# Altium PCB FPGA.PcbDoc (part 1 of 4)
Units mil, origin at the board's own origin, x right, y up, seen from the top; angles counter-clockwise.
Board outline 4000 x 2400 mil, 6 copper layers (Top Layer, InternalPlane1, MidLayer1, InternalPlane2, InternalPlane3, Bottom Layer), stack 58.8 mil thick; 235 components, 235 nets, 1406 pads, 621 vias.
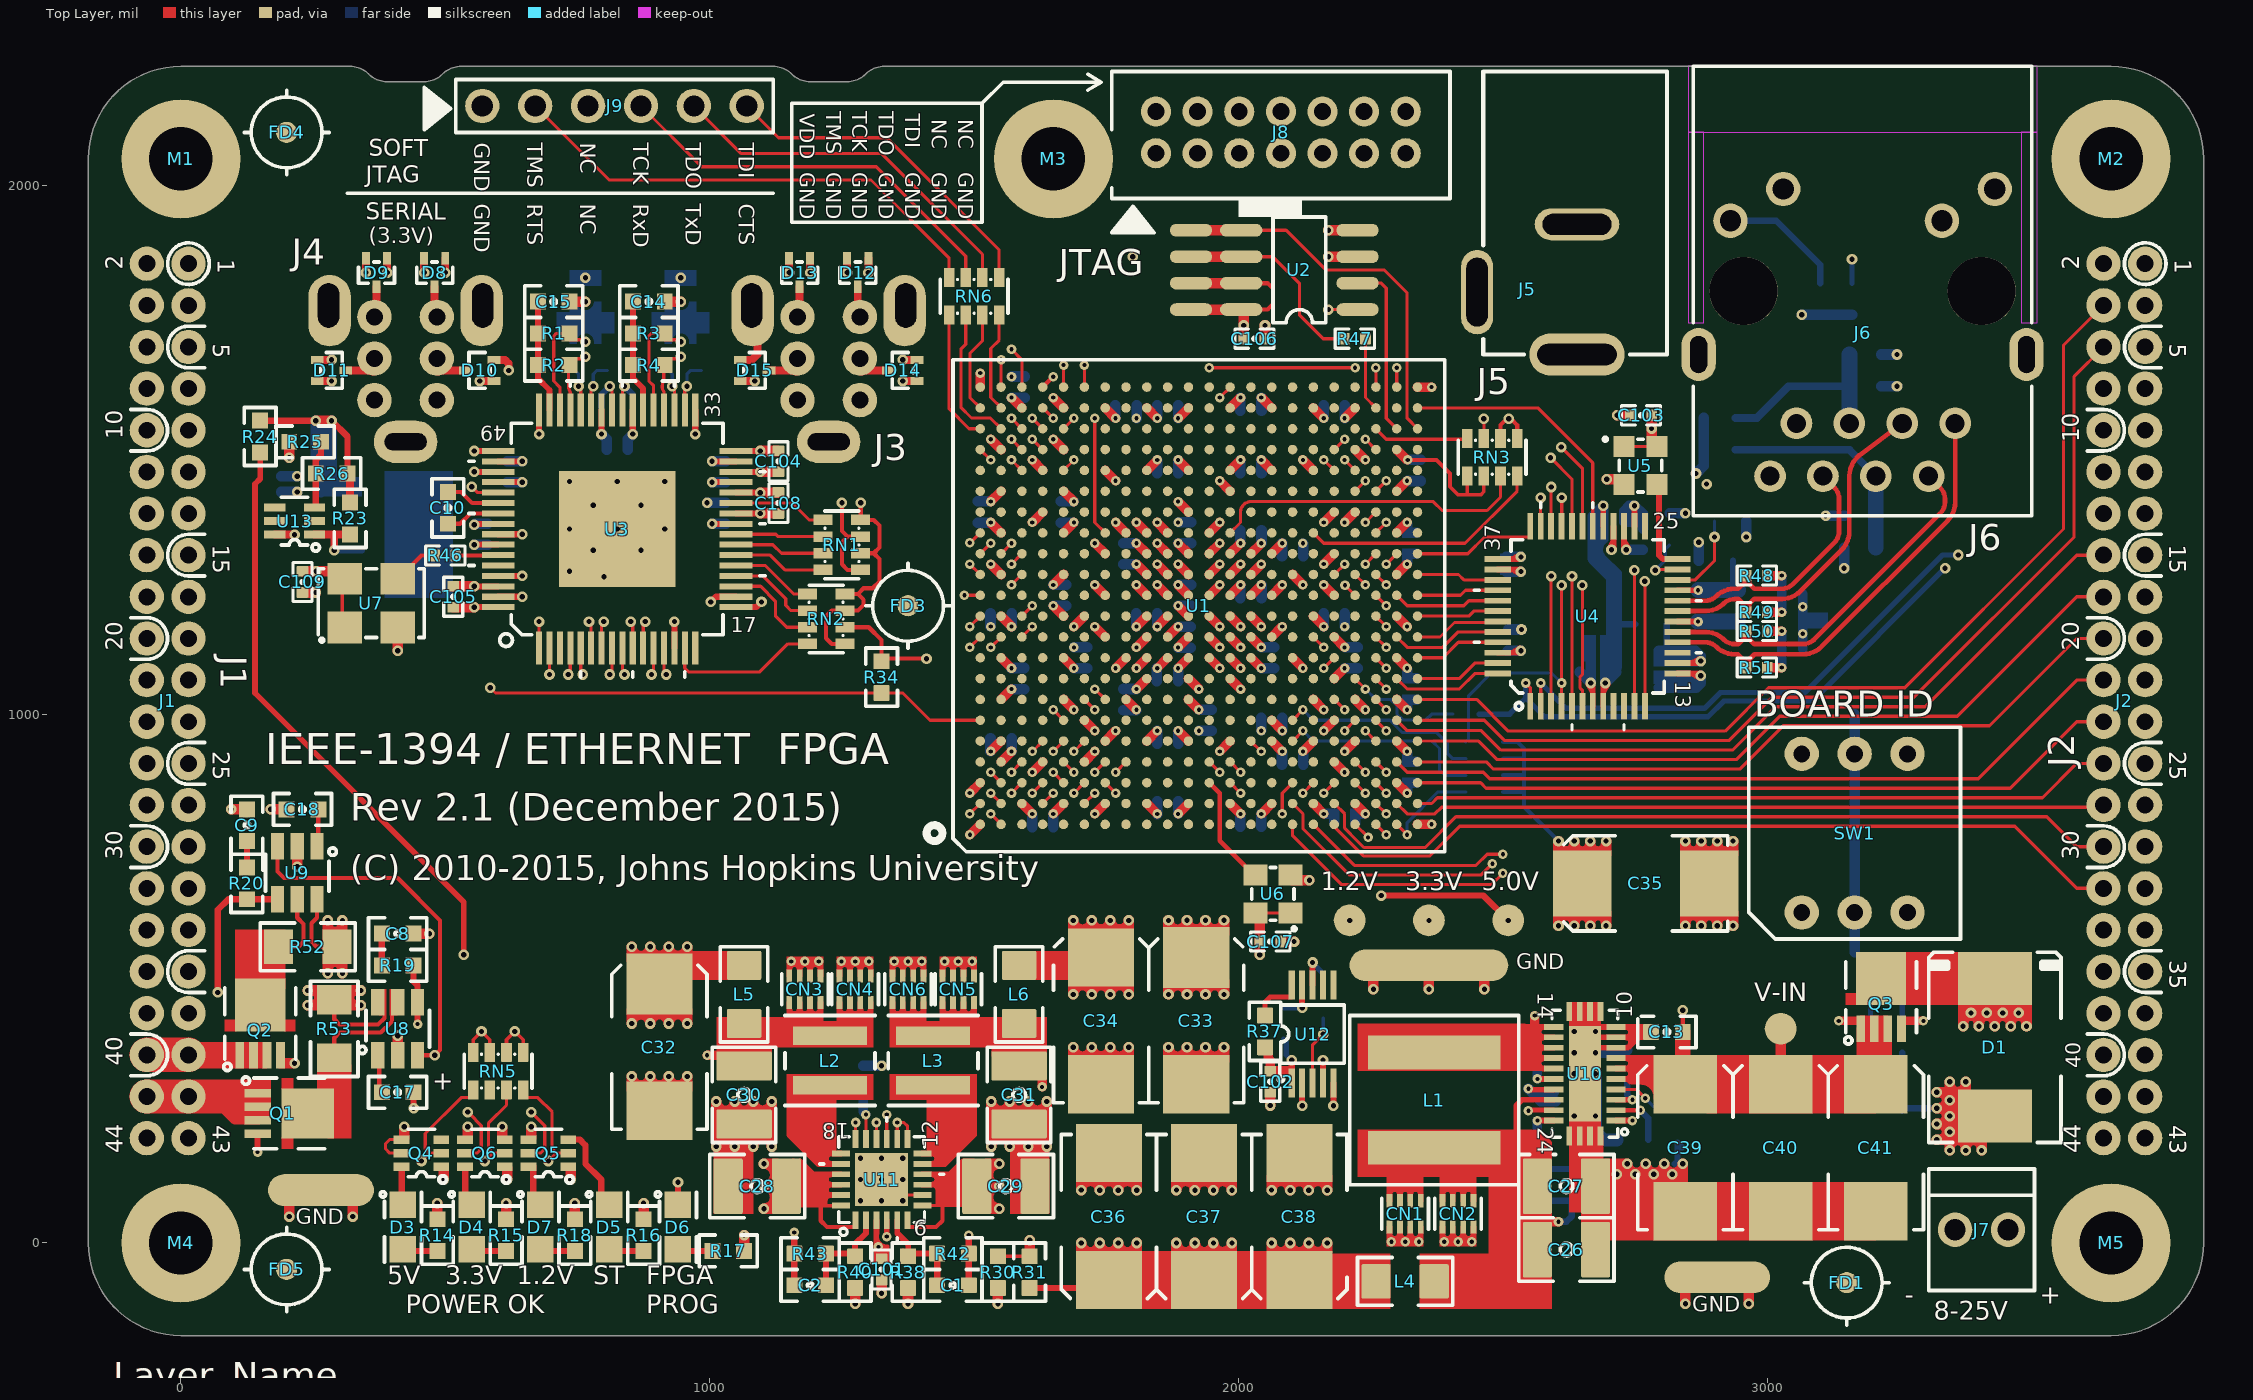
[diagram p0: Top Layer view]
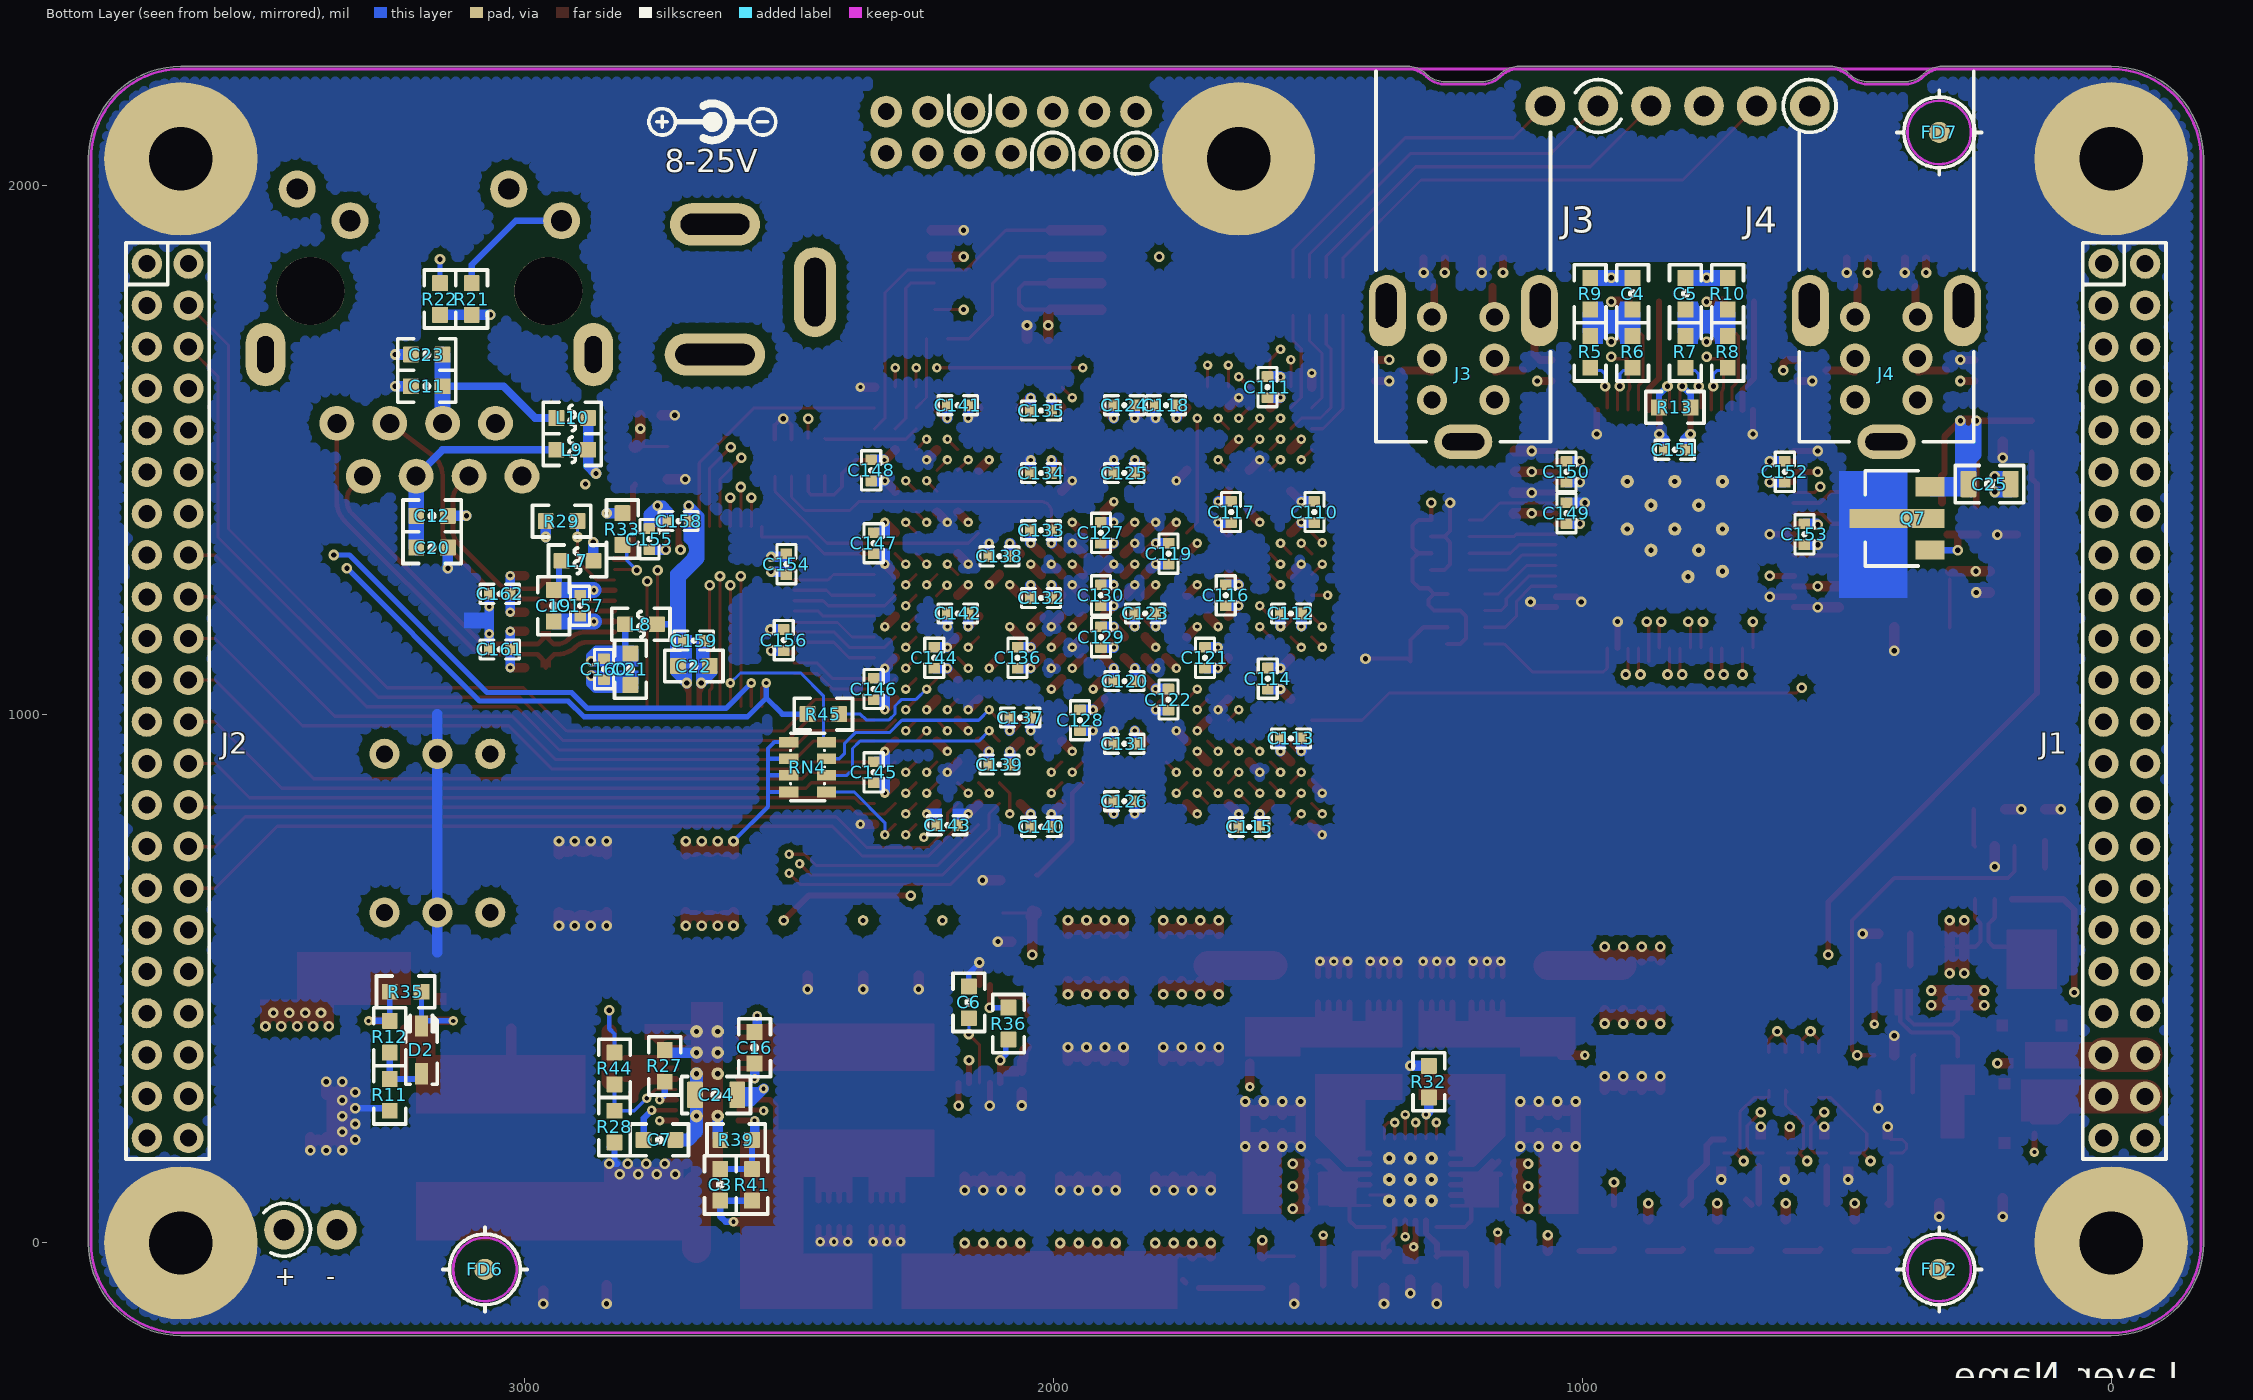
[diagram p1: Bottom Layer view, seen from below]
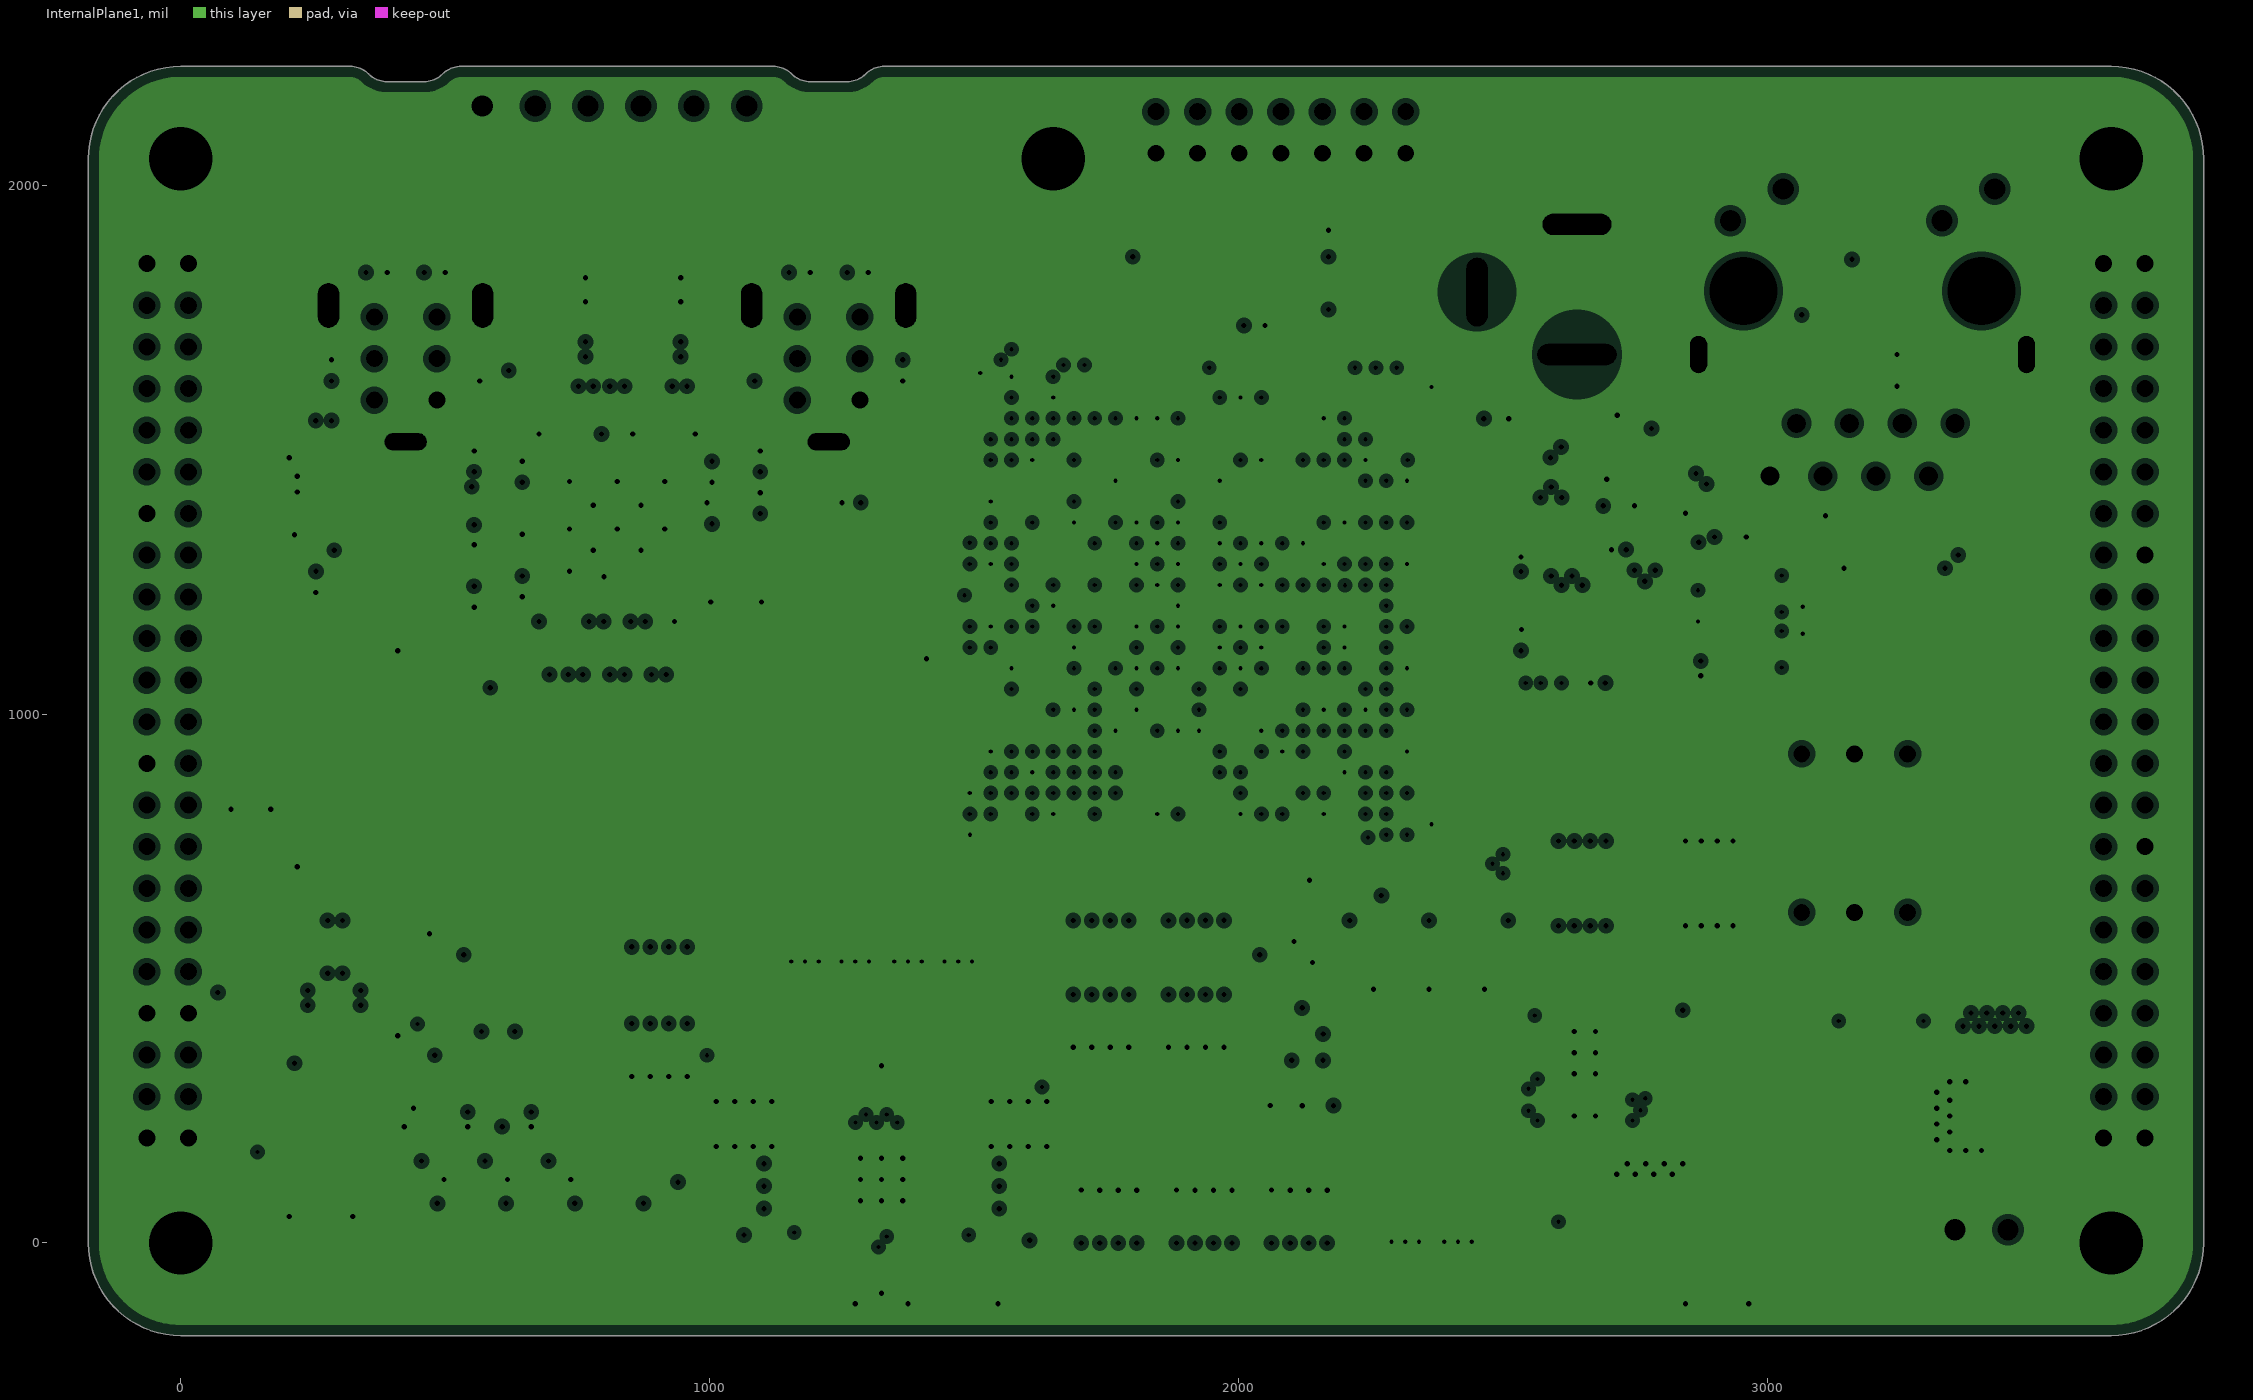
[diagram p2: InternalPlane1, clearances drawn from the general rule]
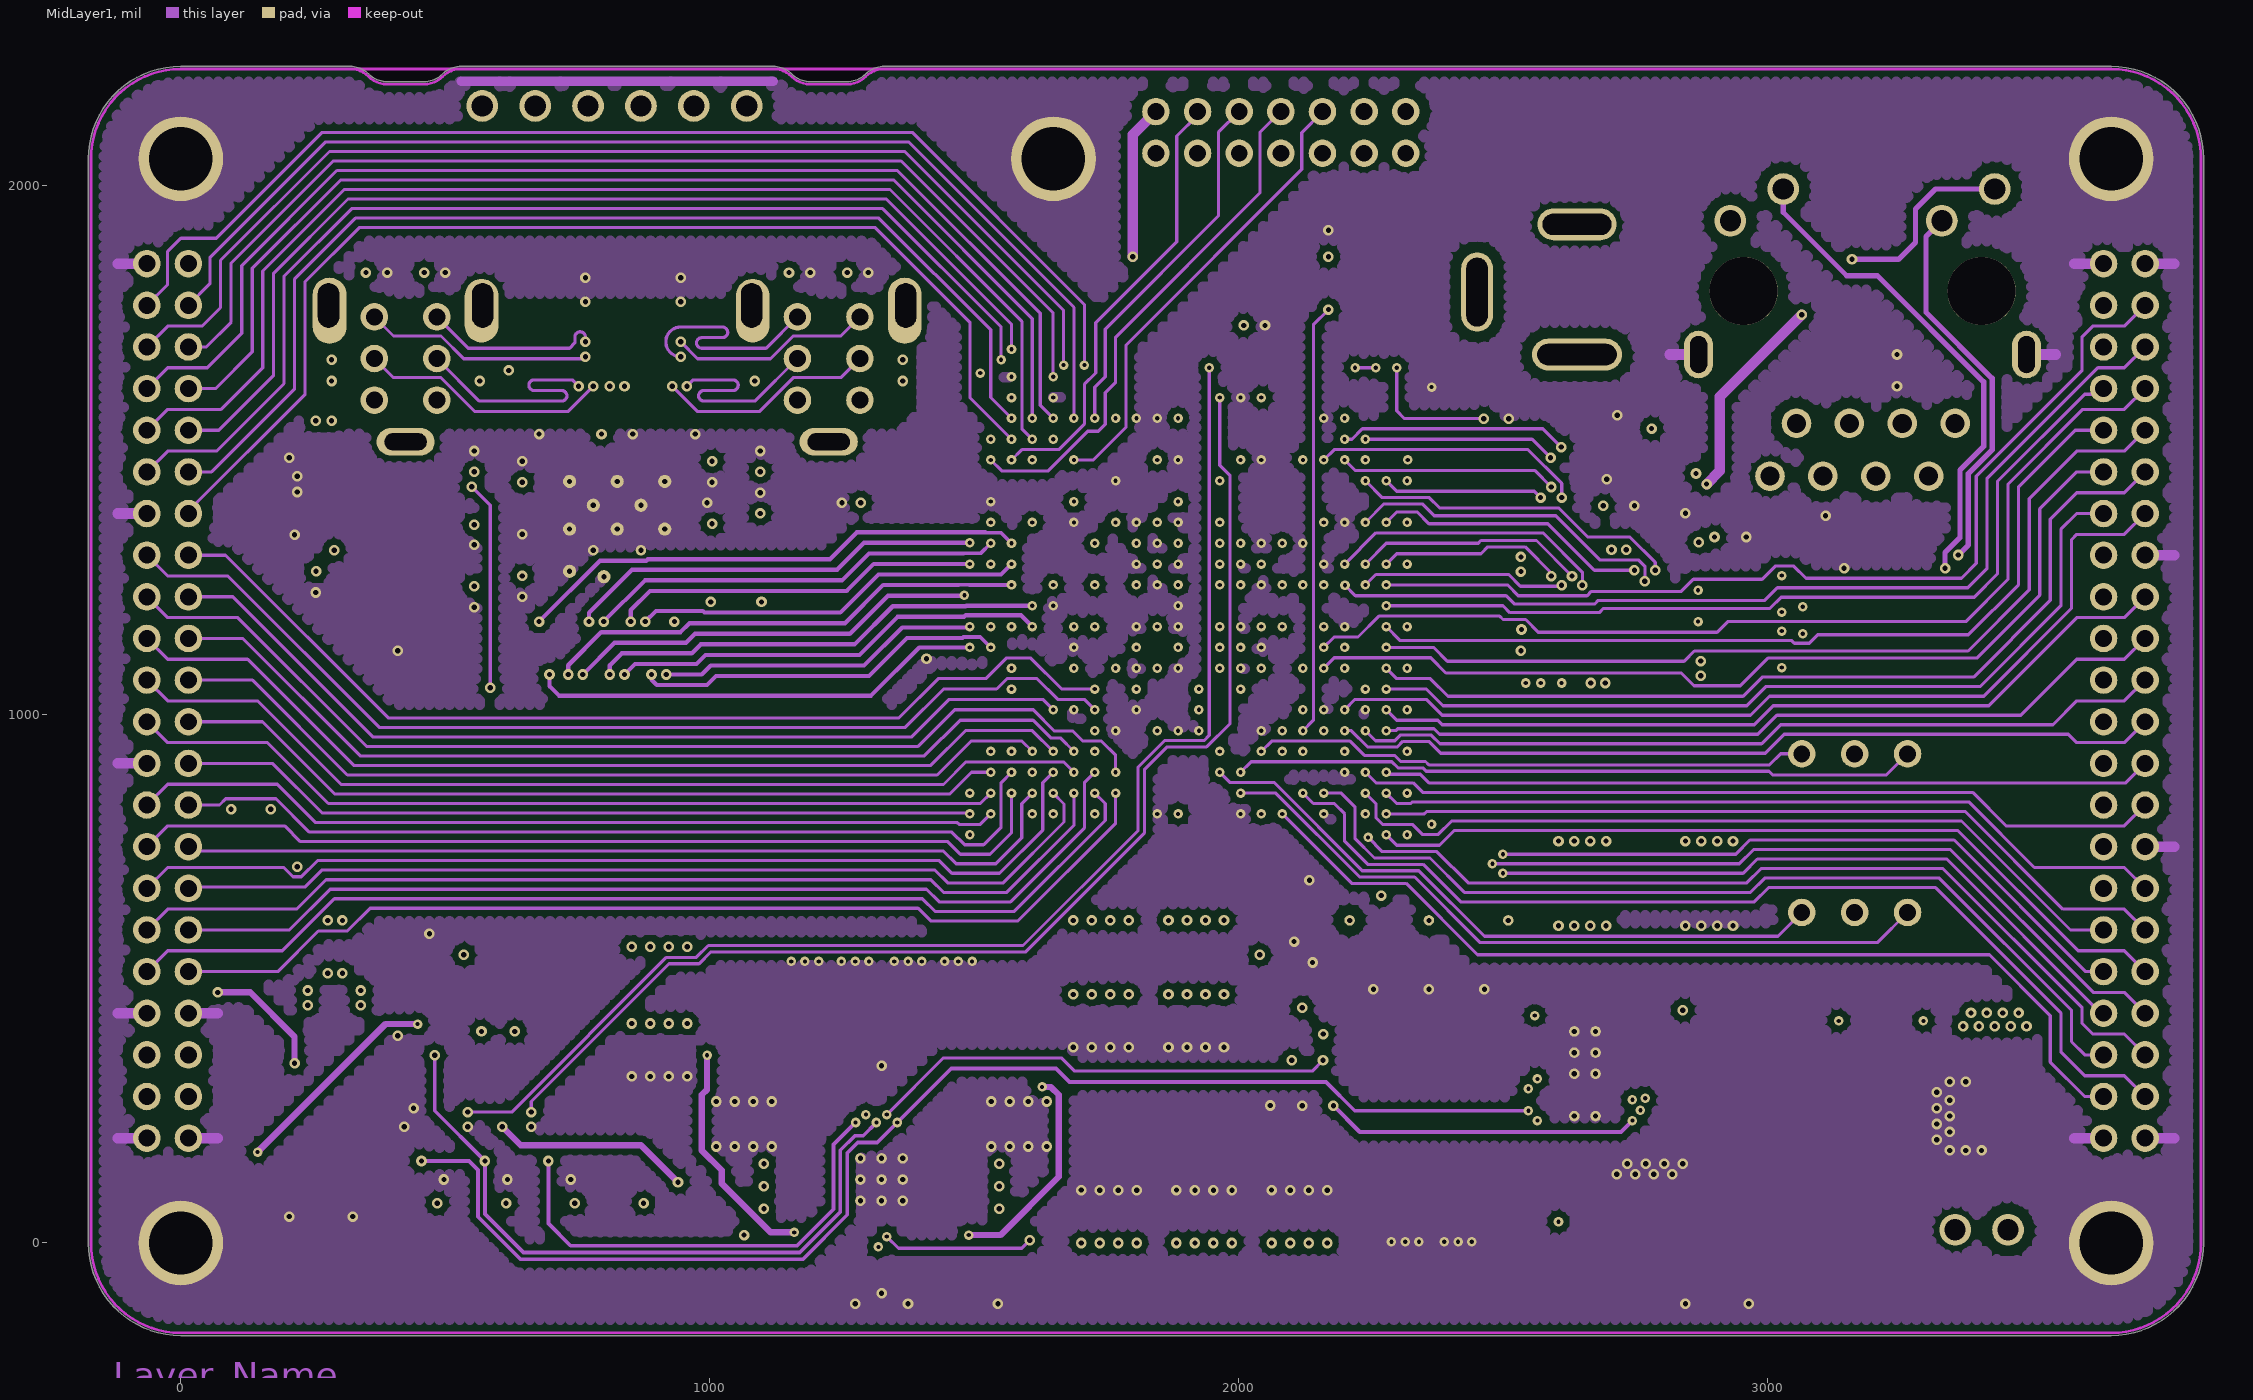
[diagram p3: MidLayer1]
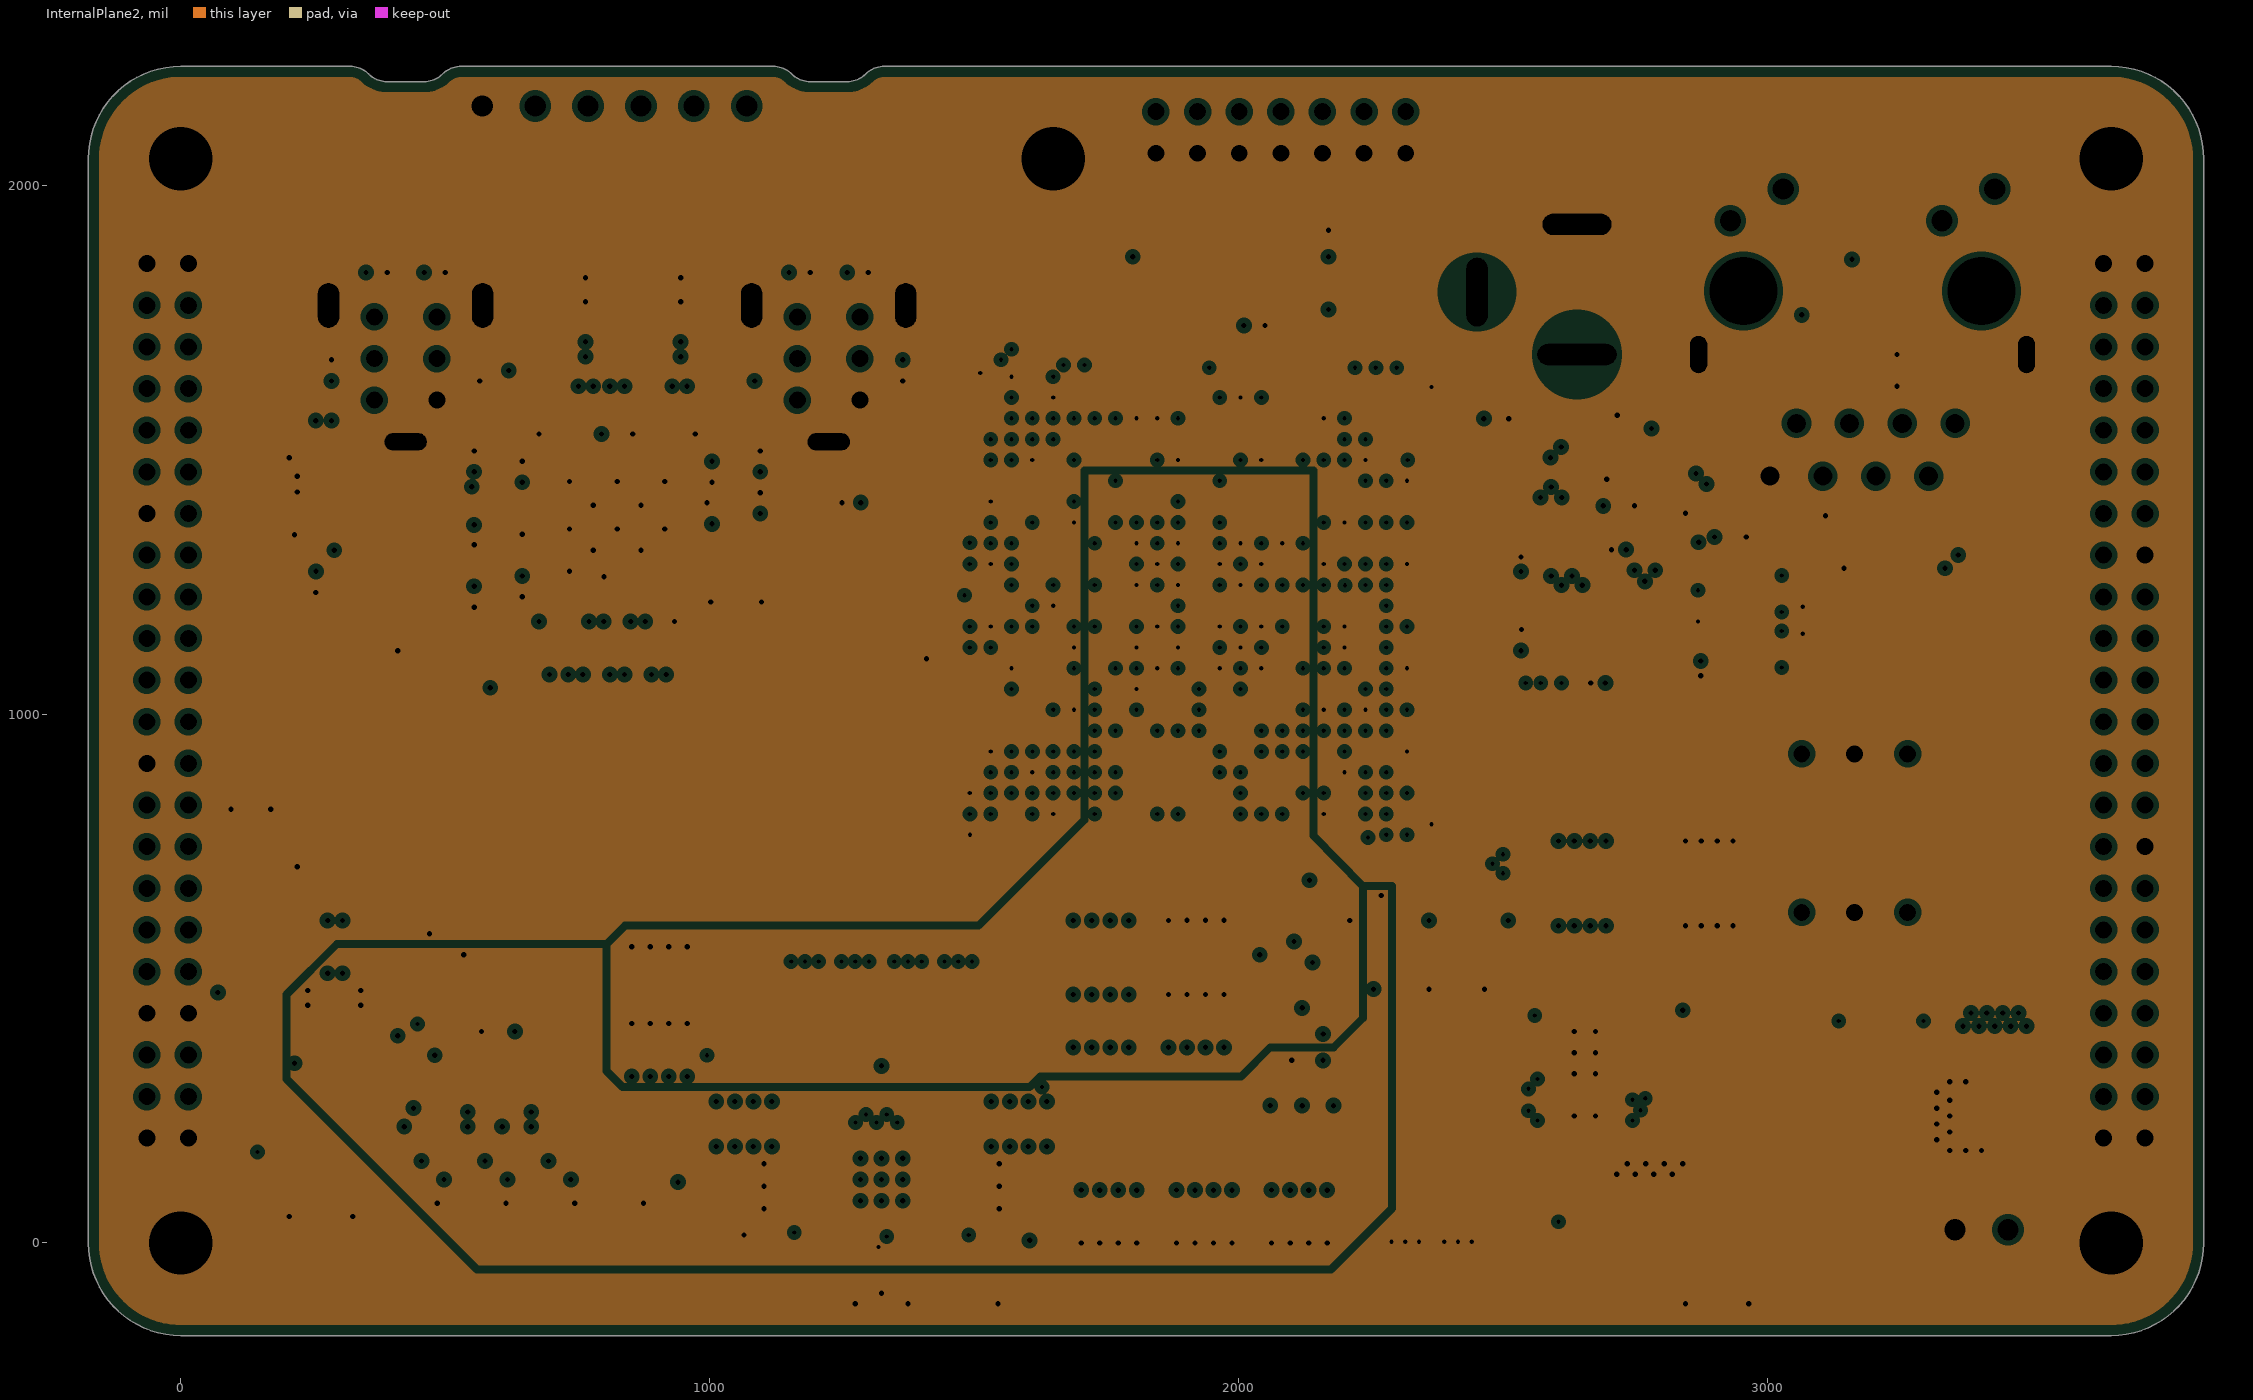
[diagram p4: InternalPlane2, clearances drawn from the general rule]
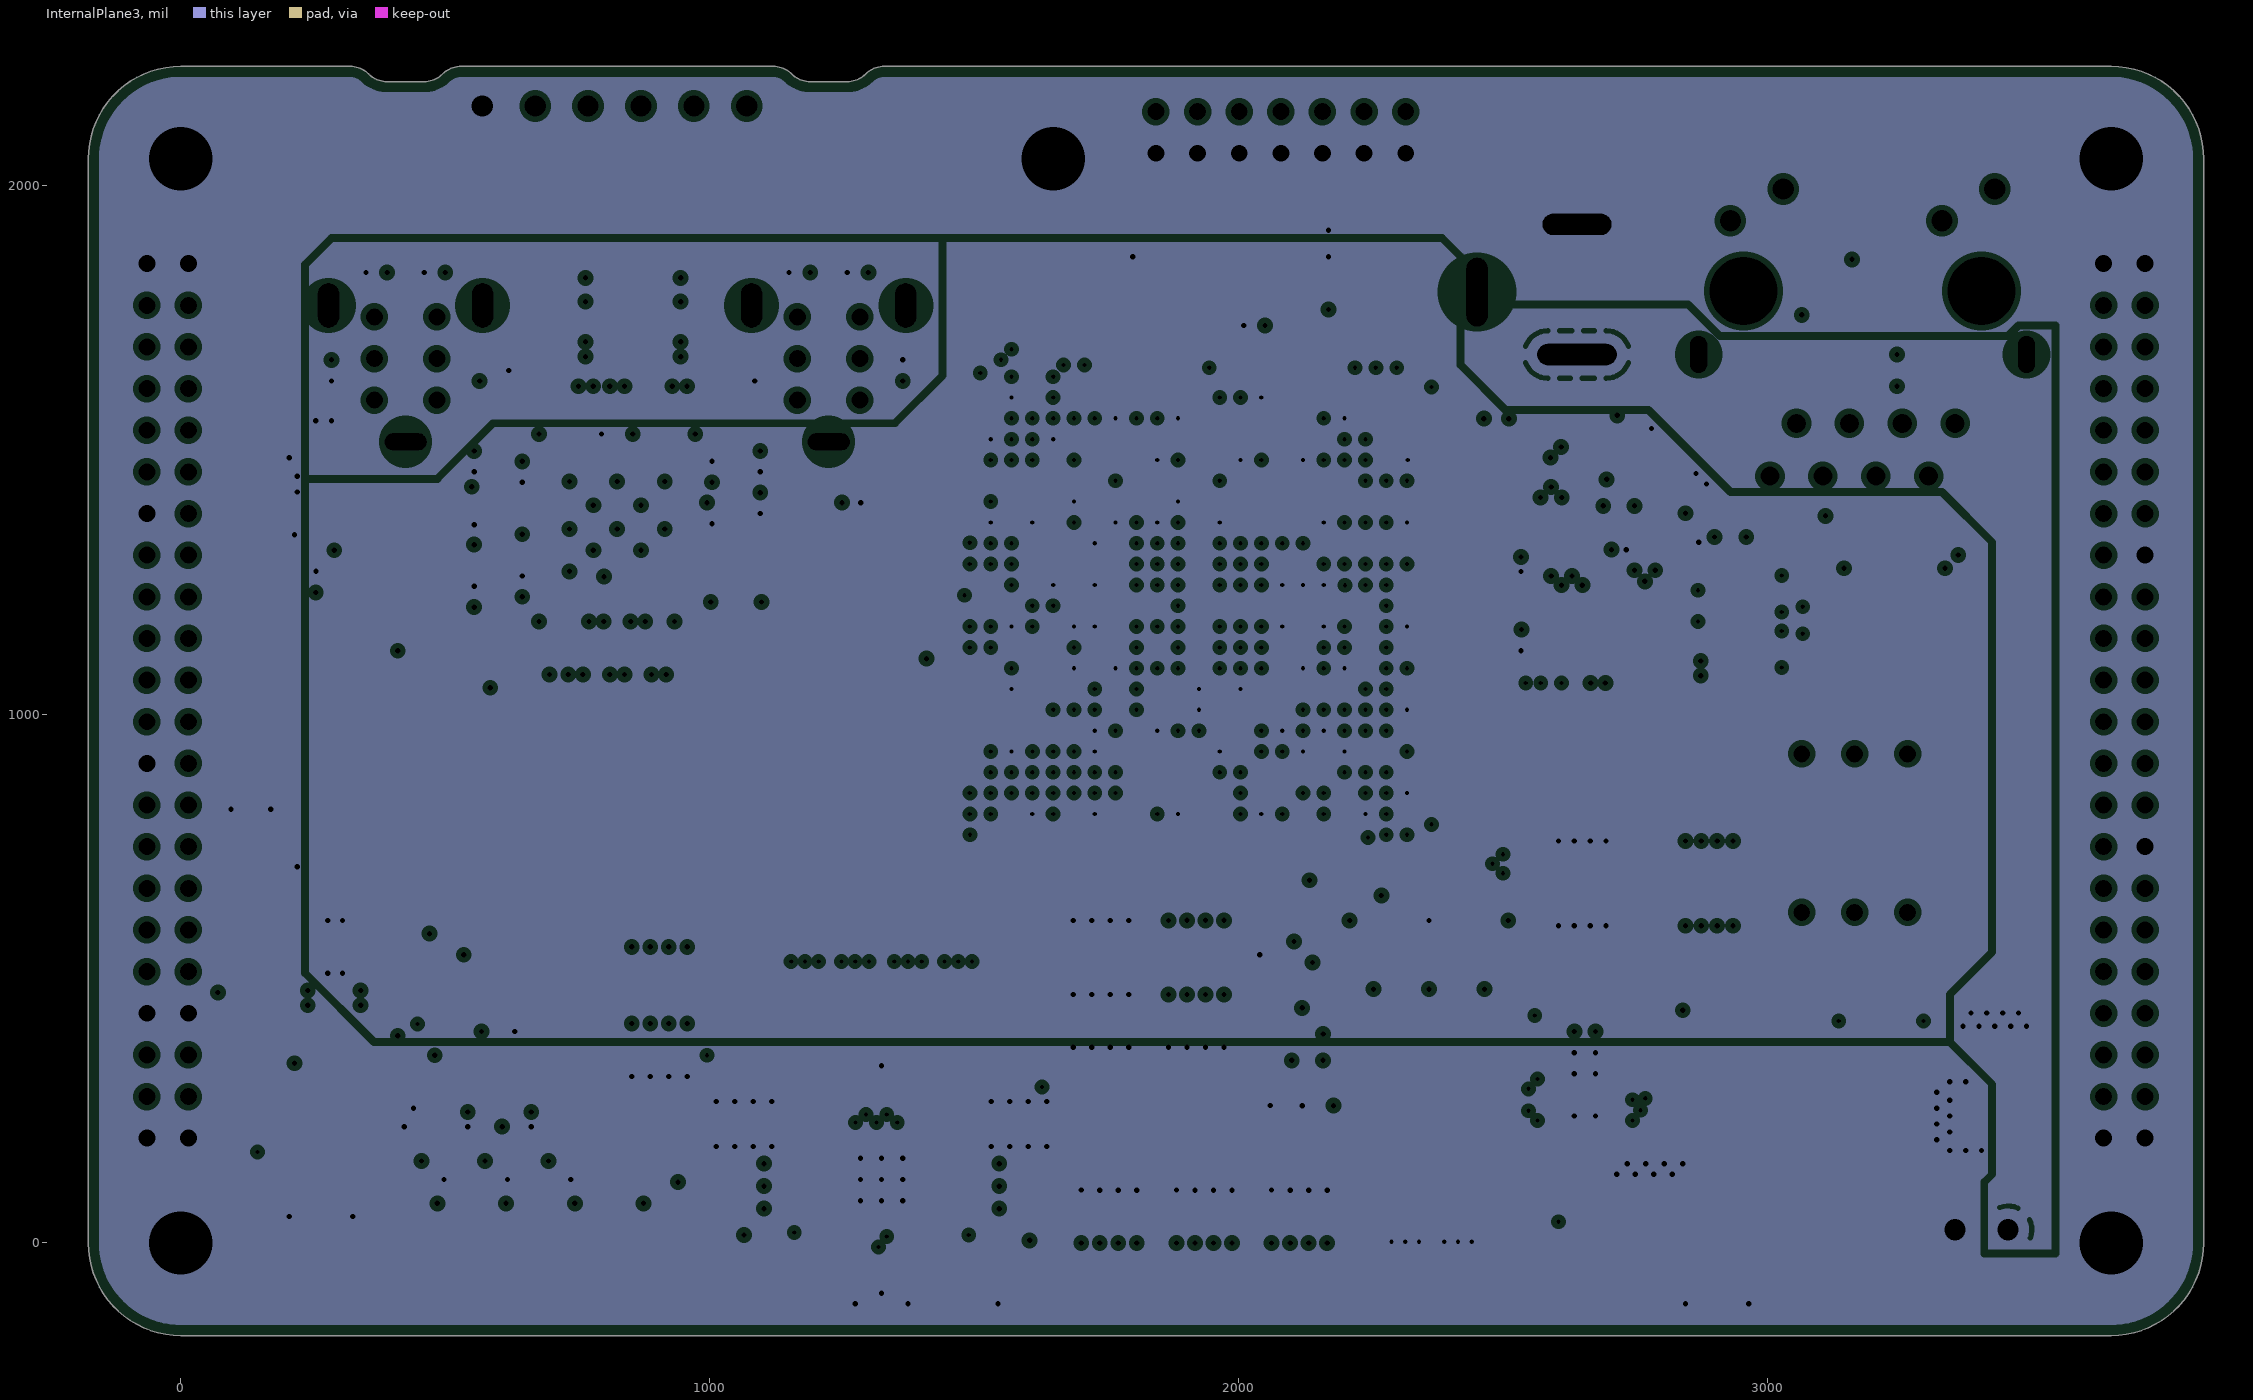
[diagram p5: InternalPlane3, clearances drawn from the general rule]

## Layer stack, top to bottom
Top Solder: solder mask 0.4, Solder Resist, Dk 3.5
Top Layer: signal copper 1.4
Dielectric1: prepreg 6, FR-4, Dk 4.3
InternalPlane1: plane copper 2.6, net GND
Dielectric3: core 12, FR-4, Dk 4.3
MidLayer1: signal copper 1.4
Dielectric2: prepreg 12, FR-4, Dk 4.3
InternalPlane2: plane copper 1.4, net (Multiple Nets)
Dielectric4: core 12, FR-4, Dk 4.3
InternalPlane3: plane copper 2.6, net (Multiple Nets)
Dielectric5: prepreg 6, FR-4, Dk 4.3
Bottom Layer: signal copper 1.4
Bottom Solder: solder mask 0.4, Solder Resist, Dk 3.5

## Board outline
0,-175 cw(c0,0) -175,0 -175,2050 cw(c0,2050) 0,2225 320,2225 cw(c320,2175.5) 355,2210.5 ccw(c390,2245.5) 390,2196 460,2196 ccw(c460,2245.5) 495,2210.5 cw(c530,2175.5) 530,2225 1120,2225 cw(c1120,2175.5) 1155,2210.5 ccw(c1190,2245.5) 1190,2196 1260,2196 ccw(c1260,2245.5) 1295,2210.5 cw(c1330,2175.5) 1330,2225 3650,2225 cw(c3650,2050) 3825,2050 3825,0 cw(c3650,0) 3650,-175

## Design rules (kind name [scope] priority, off if disabled: settings)
Clearance PolyClearPas [InPoly vs IsPadHoleValid] p1: gap=20
Clearance PolyClear [InPoly] p2: gap=12
Clearance [All] p3: gap=6
ComponentClearance [All] p1 off: gap=10 collisioncheckmode=3 verticalgap=10 showdistances=FALSE
FabricationTestPointUsage TestPointUsage [All] p1: valid=0 allowmultiple=FALSE
FabricationTestpoint Testpoint [All] p1: side=3 testpointundercomponent=TRUE minsize=40 maxsize=100 preferedsize=60 minholesize=0 maxholesize=40 preferedholesize=32 testpointgrid=1 allowsidetop=TRUE allowsidebottom=TRUE usegrid=TRUE gridtolerance=0.01
Height [All] p1 off: minheight=0 maxheight=1000 prefheight=500
HoleSize [All] p1: absolutevalues=TRUE maxlimit=250 minlimit=8 maxpercent=80.000 minpercent=20.000
HoleToHoleClearance [All] p1 off: gap=10 allowstackedmicrovias=TRUE
LayerPairs [All] p1 off: enforce=TRUE
MinimumSolderMaskSliver [All] p1 off: minsoldermaskwidth=10
NetAntennae [All] p1 off: netantennaetolerance=0
PlaneClearance PlaneClearance40 [AsMils(Hole)>40] p1: clearance=30
PlaneClearance PlaneClearance20 [AsMils(Hole)>12] p2: clearance=20
PlaneClearance [All] p3: clearance=10
PlaneConnect PlaneDirect [(AsMils(Hole)<15) Or (AsMils(Hole)>100) Or InNet('PWR')] p1: planeconnectstyle=Direct reliefexpansion=20 reliefentries=4 reliefconductorwidth=10 reliefairgap=10
PlaneConnect [All] p2: planeconnectstyle=Relief reliefexpansion=20 reliefentries=4 reliefconductorwidth=10 reliefairgap=10
PolygonConnect PolygonConnect_2 [All vs IsSMTPin] p1: connectstyle=NoConnect reliefconductorwidth=10 reliefentries=4 polygonreliefangle="90 Angle" airgapwidth=10
PolygonConnect PolygonConnect_1 [All vs (AsMils(Hole)<12) Or (AsMils(Hole)>70)] p2: connectstyle=Direct reliefconductorwidth=10 reliefentries=4 polygonreliefangle="90 Angle" airgapwidth=10
PolygonConnect [All] p3: connectstyle=NoConnect reliefconductorwidth=10 reliefentries=4 polygonreliefangle="90 Angle" airgapwidth=10
RoutingVias [All] p1: holewidth=10 width=20 viastyle="Through Hole" minholewidth=8 minwidth=18 maxholewidth=10 maxwidth=20
SilkToSilkClearance [All] p1 off: silktosilkclearance=10
SilkToSolderMaskClearance SilkscreenOverComponentPads [IsPad] p1 off: minsilkscreentomaskgap=10 clearancetoexposedcopper=TRUE
SolderMaskExpansion [All] p1: expansion=4
UnpouredPolygon [All] p1: allowunpoured=FALSE
Width [All] p1: maxlimit=200 minlimit=6 preferedwidth=7
16 further rules are at their usual default settings.

## Components (designator, comment, footprint, x,y, rotation, side; value= is the part's Value field where it differs from the comment)
C1 "10pF" C0603#1 1460,-80 r180 top
C2 "10pF" C0603#1 1190,-80 r0 top
C3 "10pF" C0603#1 2630,110 r90 bottom
C4 "220pF" C0603#2 905,1795 r90 bottom
C5 "220pF" C0603#2 805,1795 r90 bottom
C6 "1000pF" C0603#1 2160,455 r90 bottom
C7 "0.01uF" C0603#1 2745,195 r180 bottom
C8 "0.01uF" C0603#2 410,585 r0 top
C9 "0.01uF" C0603#2 125,790 r90 top
C10 "0.1uF" C0603#2 505,1390 r270 top
C11 "0.1uF" C0603#1 3185,1620 r0 bottom
C12 "0.1uF" C0603#1 3175,1375 r180 bottom
C13 "0.1uF" C0603#1 2810,399 r180 top
C14 "1.0uF" C0603#2 885,1780 r0 top
C15 "1.0uF" C0603#2 705,1780 r0 top
C16 "1.0uF" C0603#2 2565,369.21 r90 bottom
C17 "1.0uF" C0603#2 410,285 r0 top
C18 "1.0uF" C0603#2 230,820 r180 top
C19 "10uF" C0603#1 2945,1205 r270 bottom
C20 "10uF" C0603#1 3175,1315 r180 bottom
C21 "10uF" C0603#1 2800,1085 r270 bottom
C22 "10uF" C0603#1 2680,1091 r180 bottom
C23 "10uF" C0603#1 3185,1680 r0 bottom
C24 "10uF" C0805 2638,280 r0 bottom
C25 "10uF" C0805 230,1435 r180 bottom
C26 "100uF" C1210 2620,-12.5 r0 top
C27 "100uF" C1210 2620,107.5 r0 top
C28 "100uF" C1210 1090,107.5 r180 top
C29 "100uF" C1210 1560,107.5 r0 top
C30 "220uF" C1210 1065,280 r270 top
C31 "220uF" C1210 1585,280 r270 top
C32 "680uF" CAP-D-31#1 905,370 r270 top
C33 "680uF" CAP-D-31#1 1920,420 r270 top
C34 "470uF" CAP-D-31#2 1740,420 r270 top
C35 "470uF" CAP-D-31#2 2770,680 r0 top
C36 "330uF" CAP-D-31#2 1755,50 r90 top
C37 "330uF" CAP-D-31#2 1935,50 r90 top
C38 "330uF" CAP-D-31#2 2115,50 r90 top
C39 "47uF" CAP-D-31#3 2845,180 r270 top
C40 "47uF" CAP-D-31#3 3025,180 r270 top
C41 "47uF" CAP-D-31#3 3205,180 r270 top
C101 "0.1uF" C0402 1325,-50 r270 top
C102 "0.1uF" C0402 2060,305 r270 top
C103 "0.1uF" C0402 2761,1565 r180 top
C104 "0.1uF" C0402 1130,1478 r90 top
C105 "0.1uF" C0402 515,1222 r270 top
C106 "0.1uF" C0402 2030,1710 r0 top
C107 "0.1uF" C0402 2060,570 r0 top
C108 "0.1uF" C0402 1130,1399.21 r90 top
C109 "0.1uF" C0402 230,1250 r270 top
C110 "0.1uF" C0402 1506.61,1382.17 r90 bottom
C111 "0.1uF" C0402 1595.35,1618.39 r90 bottom
C112 "0.1uF" C0402 1550.98,1190.31 r180 bottom
C113 "0.1uF" C0402 1550.98,954.09 r180 bottom
C114 "0.1uF" C0402 1594.72,1067.2 r90 bottom
C115 "0.1uF" C0402 1629.72,786.61 r0 bottom
C116 "0.1uF" C0402 1674.09,1224.68 r270 bottom
C117 "0.1uF" C0402 1664.09,1382.17 r270 bottom
C118 "0.1uF" C0402 1787.2,1584.02 r0 bottom
C119 "0.1uF" C0402 1782.2,1303.43 r270 bottom
C120 "0.1uF" C0402 1865.63,1062.52 r0 bottom
C121 "0.1uF" C0402 1713.46,1106.57 r90 bottom
C122 "0.1uF" C0402 1782.52,1027.52 r270 bottom
C123 "0.1uF" C0402 1826.57,1190.32 r180 bottom
C124 "0.1uF" C0402 1865.94,1584.02 r180 bottom
C125 "0.1uF" C0402 1865.94,1455.91 r0 bottom
C126 "0.1uF" C0402 1865.94,835.35 r180 bottom
C127 "0.1uF" C0402 1910.31,1342.8 r90 bottom
C128 "0.1uF" C0402 1949.68,988.46 r270 bottom
C129 "0.1uF" C0402 1910,1145.63 r90 bottom
C130 "0.1uF" C0402 1910.31,1224.69 r270 bottom
C131 "0.1uF" C0402 1865.94,944.09 r0 bottom
C132 "0.1uF" C0402 2023.43,1219.69 r0 bottom
C133 "0.1uF" C0402 2023.43,1347.8 r0 bottom
C134 "0.1uF" C0402 2023.42,1455.91 r0 bottom
C135 "0.1uF" C0402 2023.42,1574.02 r180 bottom
C136 "0.1uF" C0402 2067.8,1106.57 r90 bottom
C137 "0.1uF" C0402 2062.79,993.46 r180 bottom
C138 "0.1uF" C0402 2102.17,1298.43 r0 bottom
C139 "0.1uF" C0402 2102.16,904.72 r180 bottom
C140 "0.1uF" C0402 2023.11,786.93 r180 bottom
C141 "0.1uF" C0402 2180.91,1584.02 r180 bottom
C142 "0.1uF" C0402 2180.91,1190.32 r0 bottom
C143 "0.1uF" C0402 2200.59,790 r180 bottom
C144 "0.1uF" C0402 2225.28,1106.57 r90 bottom
C145 "0.1uF" C0402 2340,890.04 r90 bottom
C146 "0.1uF" C0402 2340,1047.52 r90 bottom
C147 "0.1uF" C0402 2340,1323.11 r270 bottom
C148 "0.1uF" C0402 2344.68,1460.91 r270 bottom
C149 "0.1uF" C0402 1030,1380 r90 bottom
C150 "0.1uF" C0402 1030,1458.27 r270 bottom
C151 "0.1uF" C0402 825,1500 r0 bottom
C152 "0.1uF" C0402 617,1458.27 r90 bottom
C153 "0.1uF" C0402 580,1340 r270 bottom
C154 "0.1uF" C0402 2505,1283.5 r90 bottom
C155 "0.1uF" C0402 2764,1331 r90 bottom
C156 "0.1uF" C0402 2510,1140 r90 bottom
C157 "0.1uF" C0402 2895,1205 r270 bottom
C158 "0.1uF" C0402 2709,1365 r0 bottom
C159 "0.1uF" C0402 2680,1139 r180 bottom
C160 "0.1uF" C0402 2850,1085 r270 bottom
C161 "0.1uF" C0402 3047,1122.5 r0 bottom
C162 "0.1uF" C0402 3047,1227.5 r0 bottom
CN1 "0.1uF" CN0805 2315,55 r0 top
CN2 "0.1uF" CN0805 2415,55 r0 top
CN3 "0.1uF" CN0805 1180,480 r180 top
CN4 "0.1uF" CN0805 1275,480 r180 top
CN5 "0.1uF" CN0805 1470,480 r180 top
CN6 "0.1uF" CN0805 1375,480 r180 top
D1 "SMCJ26" DIODE-SMC 3430,370 r270 top
D2 "MMSZ5240" SOD-323 3195,365 r270 bottom
D3 "LED" LED-0805 420,30 r270 top
D4 "LED" LED-0805 550,30 r270 top
D5 "LED" LED-0805 810,30 r270 top
D6 "LED" LED-0805 940,30 r270 top
D7 "LED" LED-0805 680,30 r270 top
D8 "BAV99T" SOT-523 480,1835 r180 top
D9 "BAV99T" SOT-523 370,1835 r180 top
D10 "BAV99T" SOT-523 565,1650 r90 top
D11 "BAV99T" SOT-523 285,1650 r270 top
D12 "BAV99T" SOT-523 1280,1835 r180 top
D13 "BAV99T" SOT-523 1170,1835 r180 top
D14 "BAV99T" SOT-523 1365,1650 r90 top
D15 "BAV99T" SOT-523 1085,1650 r270 top
FD1 "FD" FD 3150,-75 r270 top
FD2 "FD" FD 325,-50 r180 bottom
FD3 "FD" FD 1375,1205 r0 top locked
FD4 "FD" FD 200,2100 r0 top
FD5 "FD" FD 200,-50 r0 top
FD6 "FD" FD 3075,-50 r180 bottom
FD7 "FD" FD 325,2100 r180 bottom
J1 "HEADER 22x2-1" HDR-22x2-2MM -25,1025 r270 top locked
J2 "HEADER 22x2-1" HDR-22x2-2MM 3675,1025 r270 top locked
J3 "Firewire6" Firewire6-RA#1 1225,1515 r180 bottom locked
J4 "Firewire6" Firewire6-RA#2 425,1515 r180 bottom locked
J5 "POWER JACK" RAPC712 2640,1680 r180 top locked
J6 "RJ-45-TRANSFORMER" RJ-45-TRANS 3180,1800 r0 top
J7 "HEADER 2" HDR-2x1-100 3405,25 r180 top
J8 "HEADER 7X2-1" HDR-7x2-2MM 2080,2100 r0 top locked
J9 "HEADER 6" HDR-6x1-100 820,2150 r0 top
L1 "4.7uH" INDUCTOR-XAL7030 2370,270 r180 top
L2 "3.3uF" INDUCTOR-XAL4040 1227.5,345 r0 top
L3 "3.3uF" INDUCTOR-XAL4040 1422.5,345 r0 top
L4 "FB" R1206#1 2315,-72.5 r180 top
L5 "FB" R1206#1 1065,470 r90 top
L6 "FB" R1206#1 1585,470 r90 top
L7 "1uH" L0603 2900,1290 r0 bottom
L8 "1uH" L0603 2780,1170 r180 bottom
L9 "1uH" L0603 2910,1500 r0 bottom
L10 "1uH" L0603 2910,1560 r0 bottom
M1 "MHOLE" MHOLE4 0,2050 r270 top
M2 "MHOLE" MHOLE4 3650,2050 r270 top
M3 "MHOLE" MHOLE4 1650,2050 r270 top
M4 "MHOLE" MHOLE4 0,0 r270 top
M5 "MHOLE" MHOLE4 3650,0 r270 top
Q1 "Si7108" PowerPak-1212#1 205,245 r270 top
Q2 "Si7108" PowerPak-1212#2 150,415 r0 top
Q3 "Si7611" PowerPak-1212#2 3215,465 r0 top
Q4 "PMGD370" SC70-6#1 455,170 r90 top
Q5 "PMGD370" SC70-6#1 695,170 r90 top
Q6 "PMGD370" SC70-6#1 575,170 r90 top
Q7 "DCX69-16" SOT-89 405,1370 r90 bottom
R1 "56" R0603#1 705,1720 r0 top
R2 "56" R0603#1 705,1660 r0 top
R3 "56" R0603#1 885,1720 r0 top
R4 "56" R0603#1 885,1660 r0 top
R5 "56" R0603#1 985,1685 r90 bottom
R6 "56" R0603#1 905,1685 r90 bottom
R7 "56" R0603#1 805,1685 r90 bottom
R8 "56" R0603#1 725,1685 r90 bottom
R9 "4.99K" R0603#1 985,1795 r90 bottom
R10 "4.99K" R0603#1 725,1795 r90 bottom
R11 "4.99K" R0603#2 3255,280 r270 bottom
R12 "4.99K" R0603#2 3255,390 r270 bottom
R13 "6.34K" R0603#1 825,1580 r180 bottom
R14 "499" R0603#1 485,15 r90 top
R15 "499" R0603#1 615,15 r90 top
R16 "499" R0603#1 875,15 r90 top
R17 "499" R0603#1 1035,-15 r0 top
R18 "499" R0603#1 745,15 r90 top
R19 "100" R0603#1 410,525 r180 top
R20 "100" R0603#1 125,680 r90 top
R21 "200" R0603#2 3100,1785 r90 bottom
R22 "200" R0603#2 3160,1785 r90 bottom
R23 "1.00K" R0603#1 320,1370 r270 top
R24 "1.00K" R0603#1 150,1525 r90 top
R25 "20.0K" R0603#1 235,1515 r180 top
R26 "31.6K" R0603#1 285,1455 r180 top
R27 "49.9K" R0603#2 2735,335 r90 bottom
R28 "49.9K" R0603#2 2830,220 r270 bottom
R29 "3.01K" R0603#2 2930,1365 r0 bottom
R30 "15.0K" R0603#2 1545,-55 r270 top
R31 "15.0K" R0603#2 1605,-55 r90 top
R32 "15.0K" R0603#2 1290,305 r90 bottom
R33 "133K" R0603#2 2815,1350 r90 bottom
R34 "133K" R0603#2 1325,1070 r90 top
R35 "133K" R0603#2 3225,475 r0 bottom
R36 "133K" R0603#2 2085,415 r270 bottom
R37 "66.5K" R0603#2 2050,400 r270 top
R38 "66.5K" R0603#2 1375,-55 r270 top
R39 "69.8K" R0603#2 2600,195 r0 bottom
R40 "301K" R0603#2 1275,-55 r270 top
R41 "301K" R0603#2 2570,110 r90 bottom
R42 "301K" R0603#2 1460,-20 r180 top
R43 "301K" R0603#2 1190,-20 r0 top
R44 "301K" R0603#2 2830,330 r270 bottom
R45 "OPEN" R0603#2 2435,1000 r0 bottom
R46 "49.9" R0402 500,1300 r0 top
R47 "49.9" R0402 2220,1710 r0 top
R48 "49.9" R0402 2980,1262 r180 top
R49 "49.9" R0402 2980,1193 r0 top
R50 "49.9" R0402 2980,1157 r180 top
R51 "49.9" R0402 2980,1088 r0 top
R52 "0.050" R1206#2 240,560 r180 top
R53 "0.025" R1206#3 290,405 r270 top
RN1 "4.7K" RN-742C083#1 1250,1320 r90 top
RN2 "4.7K" RN-742C083#1 1220,1180 r90 top
RN3 "4.7K" RN-742C083#1 2479.59,1485.76 r0 top
RN4 "4.7K" RN-742C083#1 2465,900 r270 bottom
RN5 "4.7K" RN-742C083#2 600,325 r0 top
RN6 "220" RN-742C083#1 1500,1790 r180 top
SW1 "SWITCH-ROT16" SW-ROT-10MM-TH 3165,775 r0 top locked
U1 "XC6SLX45-FG484" FG-484 1925,1205 r90 top locked
U2 "M25P16" SO-8 2115,1840 r90 top
U3 "TSB41AB2" PQFP-65 825,1350 r90 top
U4 "KSZ8851-16ML" QFP-48-7MM 2660,1185 r90 top
U5 "25MHz" OSC-2x2.5mm#1 2760,1470 r270 top
U6 "25MHz" OSC-2x2.5mm#2 2065,660 r90 top
U7 "KC5032C24.5760C30E00" OSC-3x5MM 360,1210 r0 top
U8 "LTC4210" SOT-23-6 410,405 r0 top
U9 "LTC4210" SOT-23-6 220,700 r180 top
U10 "LT8612" QFN-28-3x6mm 2655,320 r90 top
U11 "LTC3615" QFN-24-4mm 1325,120 r90 top
U12 "LTC6902" MSOP-10 2140,395 r0 top
U13 "TLVH431" SC70-6#2 215,1365 r90 top

## Footprints (in the part's own frame and the unit in brackets; to place one, negate y for a bottom-side part, rotate by r counter-clockwise, add the part's x,y. Pads: shape width x height; smd on the part's side, far side on the other; paste and mask are expansions set on the pad)
C0402 [mil]
  rrect15% 20x22 smd mask+2: 1(-20,0) 2(20,0)
  silkscreen extent -37,-18 37,18, body extent -20,-10 20,10, height 20
C0603#1 [mil]
  rrect10% 30x30 smd mask+2: 1(-30,0) 2(30,0)
  silkscreen extent -55,-30 55,30, body extent -30,-15 30,15, height 24
C0603#2 [mil]
  rect 30x30 smd mask+2: 1(-30,0) 2(30,0)
  silkscreen extent -55,-30 55,30, body extent -30,-15 30,15, height 24
C0805 [mil]
  rrect15% 30x50 smd mask+2: 1(-40,0) 2(40,0)
  silkscreen extent -65,-35 65,35, body extent -40,-25 40,25, height 40
C1210 [mil]
  rrect10% 55x105 smd mask+2: 1(-55,0) 2(55,0)
  silkscreen extent -90,-60 90,60, body extent -69,-53 69,53, height 87
CAP-D-31#1 [mil]
  rect 115x125 smd mask+2: 1(-120,0)
  rect 110x125 smd mask+2: 2(120,0)
  silkscreen extent -155,-90 155,90, body extent -148,-91 148,91, height 126
CAP-D-31#2 [mil]
  rect 110x125 smd mask+2: 1(-120,0) 2(120,0)
  silkscreen extent -155,-90 155,90, body extent -148,-91 148,91, height 126
CAP-D-31#3 [mil]
  rect 110x120 smd mask+2: 1(-120,0) 2(120,0)
  silkscreen extent -155,-90 155,90, body extent -148,-91 148,91, height 126
CN0805 [mil]
  rrect10% 11x25 smd mask+1: 1(-29.53,-25) 2(-9.84,-25) 3(9.84,-25) 4(29.53,-25) 5(29.53,25) 6(9.84,25) 7(-9.84,25) 8(-29.53,25)
  silkscreen extent -44,-29 44,29
DIODE-SMC [mil]
  rect 100x140 smd mask+2: 1(-130,0) 2(130,0)
  silkscreen extent -180,-125 180,125, body extent -152,-110 152,110, height 103
FD [mil]
  round 40 smd: 0(0,0)
  silkscreen extent -67,-80 80,80
FG-484 [mil]
  round 18 smd mask+2: A1(-413.39,413.39) A2(-374.02,413.39) A3(-334.65,413.39) A4(-295.28,413.39) A5(-255.91,413.39) A6(-216.54,413.39) A7(-177.17,413.39) A8(-137.8,413.39) A9(-98.43,413.39) A10(-59.06,413.39) A11(-19.68,413.39) A12(19.69,413.39) A13(59.06,413.39) A14(98.43,413.39) A15(137.8,413.39) A16(177.17,413.39) A17(216.54,413.39) A18(255.91,413.39) A19(295.28,413.39) A20(334.65,413.39) A21(374.02,413.39) A22(413.39,413.39) AA1(-413.39,-374.02) AA2(-374.02,-374.02) AA3(-334.65,-374.02) AA4(-295.28,-374.02) AA5(-255.91,-374.02) AA6(-216.54,-374.02) AA7(-177.17,-374.02) AA8(-137.8,-374.02) AA9(-98.43,-374.02) AA10(-59.06,-374.02) AA11(-19.68,-374.02) AA12(19.69,-374.02) AA13(59.06,-374.02) AA14(98.43,-374.02) AA15(137.8,-374.02) AA16(177.17,-374.02) AA17(216.54,-374.02) AA18(255.91,-374.02) AA19(295.28,-374.02) AA20(334.65,-374.02) AA21(374.02,-374.02) AA22(413.39,-374.02) AB1(-413.39,-413.39) AB2(-374.02,-413.39) AB3(-334.65,-413.39) AB4(-295.28,-413.39) AB5(-255.91,-413.39) AB6(-216.54,-413.39) AB7(-177.17,-413.39) AB8(-137.8,-413.39) AB9(-98.43,-413.39) AB10(-59.06,-413.39) AB11(-19.68,-413.39) AB12(19.69,-413.39) AB13(59.06,-413.39) AB14(98.43,-413.39) AB15(137.8,-413.39) AB16(177.17,-413.39) AB17(216.54,-413.39) AB18(255.91,-413.39) AB19(295.28,-413.39) AB20(334.65,-413.39) AB21(374.02,-413.39) AB22(413.39,-413.39) B1(-413.39,374.02) B2(-374.02,374.02) B3(-334.65,374.02) B4(-295.28,374.02) B5(-255.91,374.02) B6(-216.54,374.02) B7(-177.17,374.02) B8(-137.8,374.02) B9(-98.43,374.02) B10(-59.06,374.02) B11(-19.68,374.02) B12(19.69,374.02) B13(59.06,374.02) B14(98.43,374.02) B15(137.8,374.02) B16(177.17,374.02) B17(216.54,374.02) B18(255.91,374.02) B19(295.28,374.02) B20(334.65,374.02) B21(374.02,374.02) B22(413.39,374.02) C1(-413.39,334.65) C2(-374.02,334.65) C3(-334.65,334.65) C4(-295.28,334.65) C5(-255.91,334.65) C6(-216.54,334.65) C7(-177.17,334.65) C8(-137.8,334.65) C9(-98.43,334.65) C10(-59.06,334.65) C11(-19.68,334.65) C12(19.69,334.65) C13(59.06,334.65) C14(98.43,334.65) C15(137.8,334.65) C16(177.17,334.65) C17(216.54,334.65) C18(255.91,334.65) C19(295.28,334.65) C20(334.65,334.65) C21(374.02,334.65) C22(413.39,334.65) D1(-413.39,295.28) D2(-374.02,295.28) D3(-334.65,295.28) D4(-295.28,295.28) D5(-255.91,295.28) D6(-216.54,295.28) D7(-177.17,295.28) D8(-137.8,295.28) D9(-98.43,295.28) D10(-59.06,295.28) D11(-19.68,295.28) D12(19.69,295.28) D13(59.06,295.28) D14(98.43,295.28) D15(137.8,295.28) D16(177.17,295.28) D17(216.54,295.28) D18(255.91,295.28) D19(295.28,295.28) D20(334.65,295.28) D21(374.02,295.28) D22(413.39,295.28) E1(-413.39,255.91) E2(-374.02,255.91) E3(-334.65,255.91) E4(-295.28,255.91) E5(-255.91,255.91) E6(-216.54,255.91) E7(-177.17,255.91) E8(-137.8,255.91) E9(-98.43,255.91) E10(-59.06,255.91) E11(-19.68,255.91) E12(19.69,255.91) E13(59.06,255.91) E14(98.43,255.91) E15(137.8,255.91) E16(177.17,255.91) E17(216.54,255.91) E18(255.91,255.91) E19(295.28,255.91) E20(334.65,255.91) E21(374.02,255.91) E22(413.39,255.91) F1(-413.39,216.54) F2(-374.02,216.54) F3(-334.65,216.54) F4(-295.28,216.54) F5(-255.91,216.54) F6(-216.54,216.54) F7(-177.17,216.54) F8(-137.8,216.54) F9(-98.43,216.54) F10(-59.06,216.54) F11(-19.68,216.54) F12(19.69,216.54) F13(59.06,216.54) F14(98.43,216.54) F15(137.8,216.54) F16(177.17,216.54) F17(216.54,216.54) F18(255.91,216.54) F19(295.28,216.54) F20(334.65,216.54) F21(374.02,216.54) F22(413.39,216.54) G1(-413.39,177.17) G2(-374.02,177.17) G3(-334.65,177.17) G4(-295.28,177.17) G5(-255.91,177.17) G6(-216.54,177.17) G7(-177.17,177.17) G8(-137.8,177.17) G9(-98.43,177.17) G10(-59.06,177.17) G11(-19.68,177.17) G12(19.69,177.17) G13(59.06,177.17) G14(98.43,177.17) G15(137.8,177.17) G16(177.17,177.17) G17(216.54,177.17) G18(255.91,177.17) G19(295.28,177.17) G20(334.65,177.17) G21(374.02,177.17) G22(413.39,177.17) H1(-413.39,137.8) H2(-374.02,137.8) H3(-334.65,137.8) H4(-295.28,137.8) H5(-255.91,137.8) H6(-216.54,137.8) H7(-177.17,137.8) H8(-137.8,137.8) H9(-98.43,137.8) H10(-59.06,137.8) H11(-19.68,137.8) H12(19.69,137.8) H13(59.06,137.8) H14(98.43,137.8) H15(137.8,137.8) H16(177.17,137.8) H17(216.54,137.8) H18(255.91,137.8) H19(295.28,137.8) H20(334.65,137.8) H21(374.02,137.8) H22(413.39,137.8) J1(-413.39,98.43) J2(-374.02,98.43) J3(-334.65,98.43) J4(-295.28,98.43) J5(-255.91,98.43) J6(-216.54,98.43) J7(-177.17,98.43) J8(-137.8,98.43) J9(-98.43,98.43) J10(-59.06,98.43) J11(-19.68,98.43) J12(19.69,98.43) J13(59.06,98.43) J14(98.43,98.43) J15(137.8,98.43) J16(177.17,98.43) J17(216.54,98.43) J18(255.91,98.43) J19(295.28,98.43) J20(334.65,98.43) J21(374.02,98.43) J22(413.39,98.43) K1(-413.39,59.06) K2(-374.02,59.06) K3(-334.65,59.06) K4(-295.28,59.06) K5(-255.91,59.06) K6(-216.54,59.06) K7(-177.17,59.06) K8(-137.8,59.06) K9(-98.43,59.06) K10(-59.06,59.06) K11(-19.68,59.06) K12(19.69,59.06) K13(59.06,59.06) K14(98.43,59.06) K15(137.8,59.06) K16(177.17,59.06) K17(216.54,59.06) K18(255.91,59.06) K19(295.28,59.06) K20(334.65,59.06) K21(374.02,59.06) K22(413.39,59.06) L1(-413.39,19.69) L2(-374.02,19.69) L3(-334.65,19.69) L4(-295.28,19.69) L5(-255.91,19.69) L6(-216.54,19.69) L7(-177.17,19.69) L8(-137.8,19.69) L9(-98.43,19.69) L10(-59.06,19.69) L11(-19.68,19.69) L12(19.69,19.69) L13(59.06,19.69) L14(98.43,19.69) L15(137.8,19.69) L16(177.17,19.69) L17(216.54,19.69) L18(255.91,19.69) L19(295.28,19.69) L20(334.65,19.69) L21(374.02,19.69) L22(413.39,19.69) M1(-413.39,-19.68) M2(-374.02,-19.68) M3(-334.65,-19.68) M4(-295.28,-19.68) M5(-255.91,-19.68) M6(-216.54,-19.68) M7(-177.17,-19.68) M8(-137.8,-19.68) M9(-98.43,-19.68) M10(-59.06,-19.68) M11(-19.68,-19.68) M12(19.69,-19.68) M13(59.06,-19.68) M14(98.43,-19.68) M15(137.8,-19.68) M16(177.17,-19.68) M17(216.54,-19.68) M18(255.91,-19.68) M19(295.28,-19.68) M20(334.65,-19.68) M21(374.02,-19.68) M22(413.39,-19.68) N1(-413.39,-59.06) N2(-374.02,-59.06) N3(-334.65,-59.06) N4(-295.28,-59.06) N5(-255.91,-59.06) N6(-216.54,-59.06) N7(-177.17,-59.06) N8(-137.8,-59.06) N9(-98.43,-59.06) N10(-59.06,-59.06) N11(-19.68,-59.06) N12(19.69,-59.06) N13(59.06,-59.06) N14(98.43,-59.06) N15(137.8,-59.06) N16(177.17,-59.06) N17(216.54,-59.06) N18(255.91,-59.06) N19(295.28,-59.06) N20(334.65,-59.06) N21(374.02,-59.06) N22(413.39,-59.06) P1(-413.39,-98.43) P2(-374.02,-98.43) P3(-334.65,-98.43) P4(-295.28,-98.43) P5(-255.91,-98.43) P6(-216.54,-98.43) P7(-177.17,-98.43) P8(-137.8,-98.43) P9(-98.43,-98.43) P10(-59.06,-98.43) P11(-19.68,-98.43) P12(19.69,-98.43) P13(59.06,-98.43) P14(98.43,-98.43) P15(137.8,-98.43) P16(177.17,-98.43) P17(216.54,-98.43) P18(255.91,-98.43) P19(295.28,-98.43) P20(334.65,-98.43) P21(374.02,-98.43) P22(413.39,-98.43) R1(-413.39,-137.8) R2(-374.02,-137.8) R3(-334.65,-137.8) R4(-295.28,-137.8) R5(-255.91,-137.8) R6(-216.54,-137.8) R7(-177.17,-137.8) R8(-137.8,-137.8) R9(-98.43,-137.8) R10(-59.06,-137.8) R11(-19.68,-137.8) R12(19.69,-137.8) R13(59.06,-137.8) R14(98.43,-137.8) R15(137.8,-137.8) R16(177.17,-137.8) R17(216.54,-137.8) R18(255.91,-137.8) R19(295.28,-137.8) R20(334.65,-137.8) R21(374.02,-137.8) R22(413.39,-137.8) T1(-413.39,-177.17) T2(-374.02,-177.17) T3(-334.65,-177.17) T4(-295.28,-177.17) T5(-255.91,-177.17) T6(-216.54,-177.17) T7(-177.17,-177.17) T8(-137.8,-177.17) T9(-98.43,-177.17) T10(-59.06,-177.17) T11(-19.68,-177.17) T12(19.69,-177.17) T13(59.06,-177.17) T14(98.43,-177.17) T15(137.8,-177.17) T16(177.17,-177.17) T17(216.54,-177.17) T18(255.91,-177.17) T19(295.28,-177.17) T20(334.65,-177.17) T21(374.02,-177.17) T22(413.39,-177.17) U1(-413.39,-216.54) U2(-374.02,-216.54) U3(-334.65,-216.54) U4(-295.28,-216.54) U5(-255.91,-216.54) U6(-216.54,-216.54) U7(-177.17,-216.54) U8(-137.8,-216.54) U9(-98.43,-216.54) U10(-59.06,-216.54) U11(-19.68,-216.54) U12(19.69,-216.54) U13(59.06,-216.54) U14(98.43,-216.54) U15(137.8,-216.54) U16(177.17,-216.54) U17(216.54,-216.54) U18(255.91,-216.54) U19(295.28,-216.54) U20(334.65,-216.54) U21(374.02,-216.54) U22(413.39,-216.54) V1(-413.39,-255.91) V2(-374.02,-255.91) V3(-334.65,-255.91) V4(-295.28,-255.91) V5(-255.91,-255.91) V6(-216.54,-255.91) V7(-177.17,-255.91) V8(-137.8,-255.91) V9(-98.43,-255.91) V10(-59.06,-255.91) V11(-19.68,-255.91) V12(19.69,-255.91) V13(59.06,-255.91) V14(98.43,-255.91) V15(137.8,-255.91) V16(177.17,-255.91) V17(216.54,-255.91) V18(255.91,-255.91) V19(295.28,-255.91) V20(334.65,-255.91) V21(374.02,-255.91) V22(413.39,-255.91) W1(-413.39,-295.28) W2(-374.02,-295.28) W3(-334.65,-295.28) W4(-295.28,-295.28) W5(-255.91,-295.28) W6(-216.54,-295.28) W7(-177.17,-295.28) W8(-137.8,-295.28) W9(-98.43,-295.28) W10(-59.06,-295.28) W11(-19.68,-295.28) W12(19.69,-295.28) W13(59.06,-295.28) W14(98.43,-295.28) W15(137.8,-295.28) W16(177.17,-295.28) W17(216.54,-295.28) W18(255.91,-295.28) W19(295.28,-295.28) W20(334.65,-295.28) W21(374.02,-295.28) W22(413.39,-295.28) Y1(-413.39,-334.65) Y2(-374.02,-334.65) Y3(-334.65,-334.65) Y4(-295.28,-334.65) Y5(-255.91,-334.65) Y6(-216.54,-334.65) Y7(-177.17,-334.65) Y8(-137.8,-334.65) Y9(-98.43,-334.65) Y10(-59.06,-334.65) Y11(-19.68,-334.65) Y12(19.69,-334.65) Y13(59.06,-334.65) Y14(98.43,-334.65) Y15(137.8,-334.65) Y16(177.17,-334.65) Y17(216.54,-334.65) Y18(255.91,-334.65) Y19(295.28,-334.65) Y20(334.65,-334.65) Y21(374.02,-334.65) Y22(413.39,-334.65)
  silkscreen extent -465,-465 465,465
Firewire6-RA#1 [mil]
  round 57 / inner round 52 / far side round 65 hole 32 mask+2: 1(59.06,78.74) 2(-59.06,78.74) 3(59.06,157.48) 4(-59.06,157.48) 5(59.06,236.22) 6(-59.06,236.22)
  oval 70x135 / inner oval 64x125 / far side oval 80x135 hole 40 slot 84 at 90 deg copper offset 2,-10: 7(-145.73,257.87)
  oval 70x135 / inner oval 64x120 / far side oval 80x135 hole 40 slot 84 at 90 deg copper offset -2,-10: 8(145.73,257.87)
  oval 110x65 / inner oval 110x52 / far side oval 120x80 hole 32 slot 80 at 0 deg mask+2: 9(0,0)
  silkscreen extent -165,0 165,170
Firewire6-RA#2 [mil]
  round 57 / inner round 52 / far side round 65 hole 32 mask+2: 1(59.06,78.74) 2(-59.06,78.74) 3(59.06,157.48) 4(-59.06,157.48) 5(59.06,236.22) 6(-59.06,236.22)
  oval 70x135 / inner oval 64x120 / far side oval 80x135 hole 40 slot 84 at 90 deg copper offset 2,-10: 7(-145.73,257.87)
  oval 70x135 / inner oval 64x125 / far side oval 80x135 hole 40 slot 84 at 90 deg copper offset -2,-10: 8(145.73,257.87)
  oval 110x65 / inner oval 110x52 / far side oval 120x80 hole 32 slot 80 at 0 deg mask+2: 9(0,0)
  silkscreen extent -165,0 165,170
HDR-2x1-100 [mil] "AMP 0.100"
  round 65 / inner round 60 / far side round 75 hole 40: 1(-50,0) 2(50,0)
  silkscreen extent -100,-115 100,115
HDR-6x1-100 [mil] "AMP: 3-641215-6"
  round 65 / inner round 60 / far side round 75 hole 40: 1(-250,0) 2(-150,0) 3(-50,0) 4(50,0) 5(150,0) 6(250,0)
  silkscreen extent -300,-50 300,50
HDR-7x2-2MM [mil]
  round 57 / inner round 52 / far side round 60 hole 32: 1(-236.22,-39.37) 2(-236.22,39.37) 3(-157.48,-39.37) 4(-157.48,39.37) 5(-78.74,-39.37) 6(-78.74,39.37) 7(0,-39.37) 8(0,39.37) 9(78.74,-39.37) 10(78.74,39.37) 11(157.48,-39.37) 12(157.48,39.37) 13(236.22,-39.37) 14(236.22,39.37)
  silkscreen extent -320,-160 320,115
HDR-22x2-2MM [mil]
  round 65 / inner round 52 / far side round 57 hole 32: 1(-826.77,39.37) 2(-826.77,-39.37) 3(-748.03,39.37) 4(-748.03,-39.37) 5(-669.29,39.37) 6(-669.29,-39.37) 7(-590.55,39.37) 8(-590.55,-39.37) 9(-511.81,39.37) 10(-511.81,-39.37) 11(-433.07,39.37) 12(-433.07,-39.37) 13(-354.33,39.37) 14(-354.33,-39.37) 15(-275.59,39.37) 16(-275.59,-39.37) 17(-196.85,39.37) 18(-196.85,-39.37) 19(-118.11,39.37) 20(-118.11,-39.37) 21(-39.37,39.37) 22(-39.37,-39.37) 23(39.37,39.37) 24(39.37,-39.37) 25(118.11,39.37) 26(118.11,-39.37) 27(196.85,39.37) 28(196.85,-39.37) 29(275.59,39.37) 30(275.59,-39.37) 31(354.33,39.37) 32(354.33,-39.37) 33(433.07,39.37) 34(433.07,-39.37) 35(511.81,39.37) 36(511.81,-39.37) 37(590.55,39.37) 38(590.55,-39.37) 39(669.29,39.37) 40(669.29,-39.37) 41(748.03,39.37) 42(748.03,-39.37) 43(826.77,39.37) 44(826.77,-39.37)
  silkscreen extent -866,-70 709,79
INDUCTOR-XAL4040 [mil] "Coilcraft: XAL40xx Seriese, also XFL4020"
  rect 140x35 smd mask+3: 1(0,-47) 2(0,47)
  silkscreen extent -85,-85 85,85, body extent -85,-85 85,85, height 161
INDUCTOR-XAL7030 [mil] "Coilcraft: XAL7030"
  rect 250x64 smd mask+3: 1(0,-90) 2(0,90)
  silkscreen extent -160,-160 160,160, body extent -157,-157 157,157, height 122
L0603 [mil]
  rrect10% 30x30 smd mask+2: 1(-30,0) 2(30,0)
  silkscreen extent -55,-30 55,30
LED-0805 [mil]
  rect 50x50 smd mask+2: 1(-42,0) 2(42,0)
  silkscreen extent -67,-43 66,35
MHOLE4 [mil]
  round 225 / inner round 160 / far side round 290 hole 120: 1(0,0)
MSOP-10 [mil]
  rect 11.5x55 smd mask+1: 1(-39.37,-92.5) 2(-19.69,-92.5) 3(0,-92.5) 4(19.68,-92.5) 5(39.37,-92.5) 6(39.37,92.5) 7(19.68,92.5) 8(0,92.5) 9(-19.69,92.5) 10(-39.37,92.5)
  silkscreen extent -65,-90 60,55, body extent -59,-96 59,96, height 43
OSC-2x2.5mm#1 [mil] "TXC Corp: 8W-24.000MBB-T"
  rect 40x40 smd mask+2: 1(-36,-31) 2(36,-31) 3(36,31) 4(-36,31)
  silkscreen extent -53,-70 50,40, body extent -50,-40 48,39, height 31
OSC-2x2.5mm#2 [mil] "TXC Corp: 8W-24.000MBB-T"
  rect 40x45 smd mask+2: 1(-36,-33) 2(36,-33) 3(36,33) 4(-36,33)
  silkscreen extent -69,-44 50,40, body extent -50,-40 48,39, height 31
OSC-3x5MM [mil] "ECS-3525-200AN"
  rect 65x60 smd mask+2: 1(-50,-46) 2(50,-46) 3(50,46) 4(-50,46)
  silkscreen extent -100,-73 100,65
PowerPak-1212#1 [mil] "Also: Power33"
  rect 16x50 smd mask+2: 1(-38.39,-60) 2(-12.8,-60) 3(12.8,-60)
  rect 16.5x50 smd mask+2: 4(38.39,-60)
  rect 95x100 smd mask+2: 5(0,35)
  Top Layer region: 67,8 45,8 45,-15 67,-15
  Top Layer region: -67,-15 -45,-15 -45,8 -67,8
  silkscreen extent -69,-89 67,67, body extent -66,-70 66,70, height 44
PowerPak-1212#2 [mil] "Also: Power33"
  rect 16.5x50 smd mask+2: 1(-38.39,-60) 2(-12.8,-60) 3(12.8,-60) 4(38.39,-60)
  rect 95x100 smd mask+2: 5(0,35)
  Top Layer region: 67,8 45,8 45,-15 67,-15
  Top Layer region: -67,-15 -45,-15 -45,8 -67,8
  silkscreen extent -69,-89 67,67, body extent -66,-70 66,70, height 44
PQFP-65 [mil]
  rect 62x11.5 smd mask+1: 1(-225,147.64) 2(-225,127.95) 3(-225,108.27) 4(-225,88.58) 5(-225,68.9) 6(-225,49.21) 7(-225,29.53) 8(-225,9.84) 9(-225,-9.84) 10(-225,-29.53) 11(-225,-49.21) 12(-225,-68.9) 13(-225,-88.58) 14(-225,-108.27) 15(-225,-127.95) 16(-225,-147.64) 33(225,-147.64) 34(225,-127.95) 35(225,-108.27) 36(225,-88.58) 37(225,-68.9) 38(225,-49.21) 39(225,-29.53) 40(225,-9.84) 41(225,9.84) 42(225,29.53) 43(225,49.21) 44(225,68.9) 45(225,88.58) 46(225,108.27) 47(225,127.95) 48(225,147.64)
  rect 11.5x62 smd mask+1: 17(-147.64,-225) 18(-127.95,-225) 19(-108.27,-225) 20(-88.58,-225) 21(-68.9,-225) 22(-49.21,-225) 23(-29.53,-225) 24(-9.84,-225) 25(9.84,-225) 26(29.53,-225) 27(49.21,-225) 28(68.9,-225) 29(88.58,-225) 30(108.27,-225) 31(127.95,-225) 32(147.64,-225) 49(147.64,225) 50(127.95,225) 51(108.27,225) 52(88.58,225) 53(68.9,225) 54(49.21,225) 55(29.53,225) 56(9.84,225) 57(-9.84,225) 58(-29.53,225) 59(-49.21,225) 60(-68.9,225) 61(-88.58,225) 62(-108.27,225) 63(-127.95,225) 64(-147.64,225)
  rect 220x220 smd paste-120 mask+1: 65(0,0)
  silkscreen extent -280,-280 280,280
QFN-24-4mm [mil]
  rect 34x11 smd mask+0.5: 1(-77,49.21) 2(-77,29.53) 3(-77,9.84) 4(-77,-9.84) 5(-77,-29.53) 6(-77,-49.21) 13(77,-49.21) 14(77,-29.53) 15(77,-9.84) 16(77,9.84) 17(77,29.53) 18(77,49.21)
  rect 11x34 smd mask+0.5: 7(-49.21,-77) 8(-29.53,-77) 9(-9.84,-77) 10(9.84,-77) 11(29.53,-77) 12(49.21,-77) 19(49.21,77) 20(29.53,77) 21(9.84,77) 22(-9.84,77) 23(-29.53,77) 24(-49.21,77)
  rect 100x100 smd paste-55 mask+0.5: 25(0,0)
  silkscreen extent -117,-117 117,117, body extent -79,-79 79,79, height 30
QFN-28-3x6mm [mil]
  rect 11x36 smd mask+2: 1(-88.58,-59) 2(-68.9,-59) 3(-49.21,-59) 4(-29.53,-59) 5(-9.84,-59) 6(9.84,-59) 7(29.53,-59) 8(49.21,-59) 9(68.9,-59) 10(88.58,-59) 15(88.58,59) 16(68.9,59) 17(49.21,59) 18(29.53,59) 19(9.84,59) 20(-9.84,59) 21(-29.53,59) 22(-49.21,59) 23(-68.9,59) 24(-88.58,59)
  rect 36x11 smd mask+2: 11(118,-29.53) 12(118,-9.84) 13(118,9.84) 14(118,29.53) 25(-118,29.53) 26(-118,9.84) 27(-118,-9.84) 28(-118,-29.53)
  rect 180x60 smd paste-50 mask+1: 29(0,0)
  silkscreen extent -120,-81 120,62, body extent -118,-59 119,59, height 30
QFP-48-7MM [mil]
  rect 50x11 smd mask+1: 1(-170,108.27) 2(-170,88.58) 3(-170,68.9) 4(-170,49.21) 5(-170,29.53) 6(-170,9.84) 7(-170,-9.84) 25(170,-108.27) 26(170,-88.58) 27(170,-68.9) 28(170,-49.21) 29(170,-29.53) 30(170,-9.84) 31(170,9.84)
  rect 50x11 smd mask+0.98: 8(-170,-29.53) 9(-170,-49.21) 10(-170,-68.9) 11(-170,-88.58) 12(-170,-108.27) 32(170,29.53) 33(170,49.21) 34(170,68.9) 35(170,88.58) 36(170,108.27)
  rect 11x50 smd mask+1: 13(-108.27,-170) 14(-88.58,-170) 15(-68.9,-170) 16(-49.21,-170) 17(-29.53,-170) 18(-9.84,-170) 19(9.84,-170) 37(108.27,170) 38(88.58,170) 39(68.9,170) 40(49.21,170) 41(29.53,170) 42(9.84,170) 43(-9.84,170)
  rect 11x50 smd mask+0.98: 20(29.53,-170) 21(49.21,-170) 22(68.9,-170) 23(88.58,-170) 24(108.27,-170) 44(-29.53,170) 45(-49.21,170) 46(-68.9,170) 47(-88.58,170) 48(-108.27,170)
  silkscreen extent -215,-215 215,215
R0402 [mil]
  rrect15% 20x22 smd mask+2: 1(-20,0) 2(20,0)
  silkscreen extent -37,-18 37,18, body extent -20,-10 20,10, height 20
R0603#1 [mil]
  rect 30x30 smd mask+2: 1(-30,0) 2(30,0)
  silkscreen extent -55,-30 55,30, body extent -30,-15 30,15, height 25
R0603#2 [mil]
  rrect10% 30x30 smd mask+2: 1(-30,0) 2(30,0)
  silkscreen extent -55,-30 55,30, body extent -30,-15 30,15, height 25
R1206#1 [mil]
  rrect10% 55x65 smd mask+2: 1(-55,0) 2(55,0)
  silkscreen extent -90,-45 90,45, body extent -60,-30 60,30, height 35
R1206#2 [mil]
  rect 55x65 smd mask+2: 1(-55,0) 2(55,0)
  silkscreen extent -90,-45 90,45, body extent -60,-30 60,30, height 35
R1206#3 [mil]
  rect 55x65 smd mask+2: 1(-55,0)
  rect 54x65 smd mask+2: 2(55,0)
  silkscreen extent -90,-45 90,45, body extent -60,-30 60,30, height 35
RAPC712 [mil]
  oval 180x80 / inner oval 170x60 / far side oval 190x80 hole 40 slot 150 at 0 deg: 1(0,0)
  oval 60x160 / inner oval 60x150 / far side oval 80x170 hole 40 slot 130 at 90 deg: 2(188.98,-118.11)
  oval 160x60 / inner oval 150x60 / far side oval 170x80 hole 40 slot 130 at 0 deg: 3(0,-246.06)
  silkscreen extent -170,-535 177,0
RJ-45-TRANS [mil] "Pulse Engineering: J00-0045NL"
  round 60 / inner round 56 / far side round 66 hole 36: 1(175,-250) 2(125,-350) 3(75,-250) 4(25,-350) 5(-25,-250) 6(-75,-350) 7(-125,-250) 8(-175,-350)
  round 65 / inner round 60 / far side round 70 hole 40: 9(250,193) 10(150,133) 11(-150,193) 12(-250,133)
  oval 65x100 / inner oval 55x90 / far side oval 75x120 hole 32 slot 70 at 90 deg: 13(310,-120) 14(-310,-120)
  round 129 hole 129 unplated: 15(225,0) 16(-225,0)
  silkscreen extent -320,-425 320,425
RN-742C083#1 [mil]
  rect 20x36 smd mask+1: 1(-47.24,-35.5) 2(-15.75,-35.5) 3(15.75,-35.5) 4(47.24,-35.5) 5(47.24,35.5) 6(15.75,35.5) 7(-15.75,35.5) 8(-47.24,35.5)
  silkscreen extent -64,-32 64,32, body extent -67,-35 67,36, height 28
RN-742C083#2 [mil]
  rrect10% 20x36 smd mask+1: 1(-47.24,-35.5) 2(-15.75,-35.5) 3(15.75,-35.5) 4(47.24,-35.5) 5(47.24,35.5) 6(15.75,35.5) 7(-15.75,35.5) 8(-47.24,35.5)
  silkscreen extent -64,-32 64,32, body extent -67,-35 67,36, height 28
SC70-6#1 [mil]
  rect 16x30 smd mask+1: 1(-25.59,-37.5) 2(0,-37.5) 3(25.59,-37.5) 4(25.59,37.5) 5(0,37.5) 6(-25.59,37.5)
  silkscreen extent -57,-47 45,25, body extent -42,-47 42,47, height 43
SC70-6#2 [mil] "SC70-6, SOT-363"
  rect 15x40 smd mask+2: 1(-25.59,-37.5) 2(0,-37.5) 3(25.59,-37.5) 4(25.59,37.5) 5(0,37.5) 6(-25.59,37.5)
  silkscreen extent -57,-47 45,25, body extent -42,-47 42,47, height 43
SO-8 [mil]
  oval 24x80 smd: 1(-75,-110) 2(-25,-110) 3(25,-110) 4(75,-110) 5(75,110) 6(25,110) 7(-25,110) 8(-75,110)
  silkscreen extent -100,-50 100,50, body extent -98,-122 98,122, height 69
SOD-323 [mil]
  rect 40x25 smd mask+2: 1(-45,0) 2(45,0)
  silkscreen extent -65,-30 65,30, body extent -53,-29 53,29, height 45
SOT-23-6 [mil]
  rect 25x50 smd mask+2: 1(-37.5,-50) 2(0,-50) 3(37.5,-50) 4(37.5,50) 5(0,50) 6(-37.5,50)
  silkscreen extent -74,-47 60,35, body extent -59,-59 59,59, height 57
SOT-89 [mil]
  rect 36x55 smd mask+2: 1(-60,-62.5) 2(60,-62.5)
  rect 36x180 smd mask+2: 3(0,0)
  Top Layer region: -35,90 35,90 35,-20 -35,-20
  silkscreen extent -90,-40 90,60, body extent -89,-79 89,79, height 59
SOT-523 [mil] "Also SC-75, SOT-416"
  rect 15x24 smd mask+2: 1(-20,-27) 2(20,-27) 3(0,27)
  silkscreen extent -34,-20 34,20, body extent -33,-32 33,32, height 31
SW-ROT-10MM-TH [mil] "Grauhill 94H seriese"
  round 65 / inner round 52 / far side round 57 hole 32 mask+2: 1(-100,-150) 2(0,-150) 3(100,-150) 4(100,150) 5(0,150) 6(-100,150)
  silkscreen extent -200,-200 200,200

## Part data
C1 C2 C3 C10 C16: library part CAP
C4 C5 C6 C7 C8 C9 C11 C12 C13 C14 C15 C17 C18 C19 C20 C21 C22 C23 C24 C25 C26 C27 C28 C29 C30 C31 C101 C102 C103 C104 C105 C106 C107 C108 C109 C110 C111 C112 C113 C114 C115 C116 C117 C118 C119 C120 C121 C122 C123 C124 C125 C126 C127 C128 C129 C130 C131 C132 C133 C134 C135 C136 C137 C138 C139 C140 C141 C142 C143 C144 C145 C146 C147 C148 C149 C150 C151 C152 C153 C154 C155 C156 C157 C158 C159 C160 C161 C162: library part CAP-GND
C32 C33 C34 C35 C36 C37 C38 C39 C40 C41: library part CAP-POL-GND
CN1 CN2 CN3 CN4 CN5 CN6: library part CN-GND
D1: library part TVS-GND
D2: library part ZENER
D8 D9 D10 D11 D12 D13 D14 D15: library part DIODE-2/SER
L1 L2 L3 L4 L5 L6 L7 L8 L9 L10: library part INDUCTOR
M1 M2 M3 M4 M5: "Mounting Hole"
Q1 Q2: library part MOSFET-N-PPACK
Q3: library part MOSFET-P-PPACK
Q4 Q5 Q6: library part MOSFET-N-DUAL6
Q7: library part PNP-SM
R1 R2 R3 R4 R5 R6 R7 R8 R13 R19 R20 R23 R24 R26: library part R-MINI
R9 R10 R11 R25 R27 R28 R29 R30 R32 R33 R34 R38 R39 R40: library part R-GND
R12 R14 R15 R16 R17 R18 R21 R22 R31 R35 R36 R37 R41 R42 R43 R44 R45 R46 R47 R48 R49 R50 R51 R52 R53: library part R
RN1 RN2 RN3 RN4: library part RN-DISC-SM-4X
RN5 RN6: library part RN-DISC-SM-4
U2: library part 25AA128
U3: "IEEE 1394a-2000 Two-port Transceiver/Arbiter"
U5 U6 U7: library part OSCILATOR
U13: library part TLVH431-SC70

## Free pads (board coordinates)
  oval 200x60 smd paste-100: 0(265,100) 0(2905,-65)
  round 20 / inner round 20 / far side round 24 hole 10 mask-4: 0(1285,80) 0(1285,120) 0(1285,160) 0(1325,80) 0(1325,120) 0(1325,160) 0(1365,80) 0(1365,120) 0(1365,160) 0(2635,240) 0(2635,320) 0(2635,360) 0(2635,400) 0(2675,240) 0(2675,320) 0(2675,360) 0(2675,400)
  oval 80x24 smd: 0(1910,1765) 0(1910,1815) 0(1910,1865) 0(1910,1915)
  round 60 / inner round 20 / far side round 20 hole 10 paste-100: 0(2210,610) 0(2360,610) 0(2510,610)
  oval 300x60 smd paste-100: 0(2360,525)
  round 60 smd paste-100: 0(3025,405)
  round 25 hole 10 mask-4: 1(735,1270) 1(735,1350) 1(735,1440) 1(780,1395) 1(800,1260) 1(825,1350) 1(825,1440) 1(870,1395) 1(915,1350) 1(915,1440)
  round 25 / inner round 20 / far side round 25 hole 10 mask-4: 1(780,1310) 1(870,1310)

## Via types
v1: diameter 20, hole 10, Top Layer to Bottom Layer, tented both sides, 322 vias
v2: diameter 18, hole 8, Top Layer to Bottom Layer, tented both sides, 299 vias

## Nets (pads, with @x,y where several pads share a name; then routed paths per layer and width w, separated by ;. In a path a pad name is that pad's centre, name@x,y a point inside that pad or via, vN(x,y) a via of type N, cw(c..) or ccw(c..) an arc to the next point about the centre after c; other vN are vias at no path point)
1.2V: C32.1 C33.1 C119.1 C120.1 C122.1 C123.1 C127.1 C129.1 C130.1 C132.1 C133.1 C136.1 C138.1 L5.2 pad.0@2210,610 U1.J8 U1.J10 U1.J12 U1.J14 U1.K9 U1.K11 U1.K13 U1.L10 U1.L12 U1.L14 U1.M9 U1.M11 U1.M13 U1.N10 U1.N12 U1.N14 U1.P9 U1.P11 U1.P13 U1.R14 | length 2680.5
  Top Layer w18: v2(1806.89,1047.52) U1.J8@1826.57,1067.2 ; v2(1806.89,1126.26) U1.J10@1826.57,1145.94 ; v2(1806.89,1244.37) U1.J12@1826.57,1224.69 ; v2(1806.89,1323.11) U1.J14@1826.57,1303.43 ; v2(1846.26,1086.89) U1.K9@1865.94,1106.57 ; v2(1846.26,1165.63) U1.K11@1865.94,1185.32 ; v2(1846.26,1283.74) U1.K13@1865.94,1264.06 ; v2(1885.63,1126.26) U1.L10@1905.31,1145.94 ; v2(1885.63,1244.37) U1.L12@1905.31,1224.69 ; v2(1885.63,1323.11) U1.L14@1905.31,1303.43 ; U1.M9@1944.68,1106.57 v2(1964.37,1086.89) ; U1.M11@1944.68,1185.32 v2(1964.37,1165.63) ; U1.M13@1944.68,1264.06 v2(1964.37,1283.74) ; U1.N10@1984.06,1145.94 v2(2003.74,1126.26) ; U1.N12@1984.06,1224.69 v2(2003.74,1244.37) ; U1.N14@1984.06,1303.43 v2(2003.74,1323.11) ; U1.P9@2023.43,1106.57 v2(2043.11,1086.89) ; U1.P11@2023.43,1185.32 v2(2043.11,1165.63) ; U1.P13@2023.43,1264.06 v2(2043.11,1283.74) ; U1.R14@2062.8,1303.43 v2(2082.48,1323.11)
  Top Layer w20: C32.1@852.5,440 v1(852.5,415) ; C32.1@852.5,535 v1(852.5,560) ; C32.1@887.5,440 v1(887.5,415) ; C32.1@887.5,535 v1(887.5,560) ; C32.1@922.5,440 v1(922.5,415) ; C32.1@922.5,535 v1(922.5,560) ; C32.1@957.5,440 v1(957.5,415) ; C32.1@957.5,535 v1(957.5,560) ; C33.1@1867.5,495 v1(1867.5,470) ; C33.1@1867.5,585 v1(1867.5,610) ; C33.1@1902.5,495 v1(1902.5,470) ; C33.1@1902.5,585 v1(1902.5,610) ; C33.1@1937.5,495 v1(1937.5,470) ; C33.1@1937.5,585 v1(1937.5,610) ; C33.1@1972.5,495 v1(1972.5,470) ; C33.1@1972.5,585 v1(1972.5,610) ; v1(852.5,415) cw(c870,415) v1(887.5,415) ; v1(852.5,415) cw(c870,415) v1(887.5,415) ; v1(852.5,560) ccw(c870,560) v1(887.5,560) ; v1(852.5,560) ccw(c870,560) v1(887.5,560) ; v1(887.5,415) cw(c905,415) v1(922.5,415) ; v1(887.5,415) cw(c905,415) v1(922.5,415) ; v1(887.5,560) ccw(c905,560) v1(922.5,560) ; v1(887.5,560) ccw(c905,560) v1(922.5,560) ; v1(922.5,415) cw(c940,415) v1(957.5,415) ; v1(922.5,415) cw(c940,415) v1(957.5,415) ; v1(922.5,560) ccw(c940,560) v1(957.5,560) ; v1(922.5,560) ccw(c940,560) v1(957.5,560) ; v1(1867.5,470) cw(c1885,470) v1(1902.5,470) ; v1(1867.5,470) cw(c1885,470) v1(1902.5,470) ; v1(1867.5,610) ccw(c1885,610) v1(1902.5,610) ; v1(1867.5,610) ccw(c1885,610) v1(1902.5,610) ; v1(1902.5,470) cw(c1920,470) v1(1937.5,470) ; v1(1902.5,470) cw(c1920,470) v1(1937.5,470) ; v1(1902.5,610) ccw(c1920,610) v1(1937.5,610) ; v1(1902.5,610) ccw(c1920,610) v1(1937.5,610) ; v1(1937.5,470) cw(c1955,470) v1(1972.5,470) ; v1(1937.5,470) cw(c1955,470) v1(1972.5,470) ; v1(1937.5,610) ccw(c1955,610) v1(1972.5,610) ; v1(1937.5,610) ccw(c1955,610) v1(1972.5,610)
  Top Layer w55: C32.1@925,525 L5.2@1065,525
  Bottom Layer w20: C119.1@1782.2,1323.43 v2@1805.94,1323.43 ; C122.1@1782.52,1047.52 v2(1806.89,1047.52) ; C120.1@1845.63,1062.52 v2@1845.63,1086.26 ; v2@1846.57,1166.57 C123.1@1846.57,1190.32 ; v2@1885.94,1322.8 C127.1@1910.31,1322.8 ; v2@1886.26,1125.63 C129.1@1910,1125.63 ; v2@1886.57,1244.69 C130.1@1910.31,1244.69 ; C132.1@2003.43,1219.69 v2@2003.43,1244.06 ; v2@2003.43,1323.43 C133.1@2003.43,1347.8 ; v2@2044.06,1086.57 C136.1@2067.8,1086.57 ; C138.1@2082.17,1298.43 v2@2082.17,1322.8
1.8V: C22.1 C158.1 C159.1 L8.2 U4.8 U4.29 | length 823.7
  Top Layer w11: U4.8@2689.53,1015 2689.53,1042.97 ; v1@2689.53,1058.9 2689.53,1042.97 ; U4.29@2689.53,1355 v1(2689.53,1393.9) ; v1@2697.42,1056.65 2689.53,1042.97
  Bottom Layer w10: 2689.53,1329.18 2689.53,1383.9 v1(2689.53,1393.9) ; v1@2694.53,1393.9 2694.53,1329.18 ccw(c2705.21,1311.1) 2690.36,1296.25 2720,1266.62 2720,1240
  Bottom Layer w12: 2710,1170 L8.2@2750,1170
  Bottom Layer w20: 2670,1360 2670,1364.37 ; 2689.53,1383.9 2670,1364.37 ; v1(2689.53,1393.9) 2670,1374.37 2670,1364.37 ; 2693.53,1124.16 v1(2693.53,1058.9) C22.1@2714.37,1079.74
  Bottom Layer w28: 2674,1295 2674,1360
  Bottom Layer w30: 2675,1295 2710,1260 2710,1170 C22.1@2710,1091 C22.1@2710,1090
1.8V-AN: C21.1 C160.1 L8.1 U4.14 | length 207
  Top Layer w11: U4.14@2830,1096.42 2857.97,1096.42 ; v1@2871.65,1104.31 2857.97,1096.42 ; v1@2873.9,1096.42 2857.97,1096.42
  Bottom Layer w12: C21.1@2810,1120 L8.1@2810,1170
  Bottom Layer w20: C21.1@2795,1120 2810,1120 2825,1120 ; 2825,1115 2825,1120 ; v1(2873.9,1100.42) 2873.9,1109.5 2863.4,1120 2825,1120
3.3V-AN: C19.1 C157.1 L7.2 U4.21 | length 169.2
  Top Layer w11: U4.21@2830,1234.21 v2(2868.9,1234.21)
  Bottom Layer w12: C19.1@2935,1235 L7.2@2935,1290
  Bottom Layer w30: v2@2869.68,1235 2935,1235 C19.1@2945,1235